# Altium PCB DMX Interface.PcbDoc (part 1 of 3)
Units mm, origin at the board's own origin, x right, y up, seen from the top; angles counter-clockwise.
Board outline 110 x 81.5 mm, 4 copper layers (Top Layer, Int1 (GND), Int2 (PWR), Bottom Layer), stack 1.586 mm thick; 144 components, 113 nets, 496 pads, 326 vias.
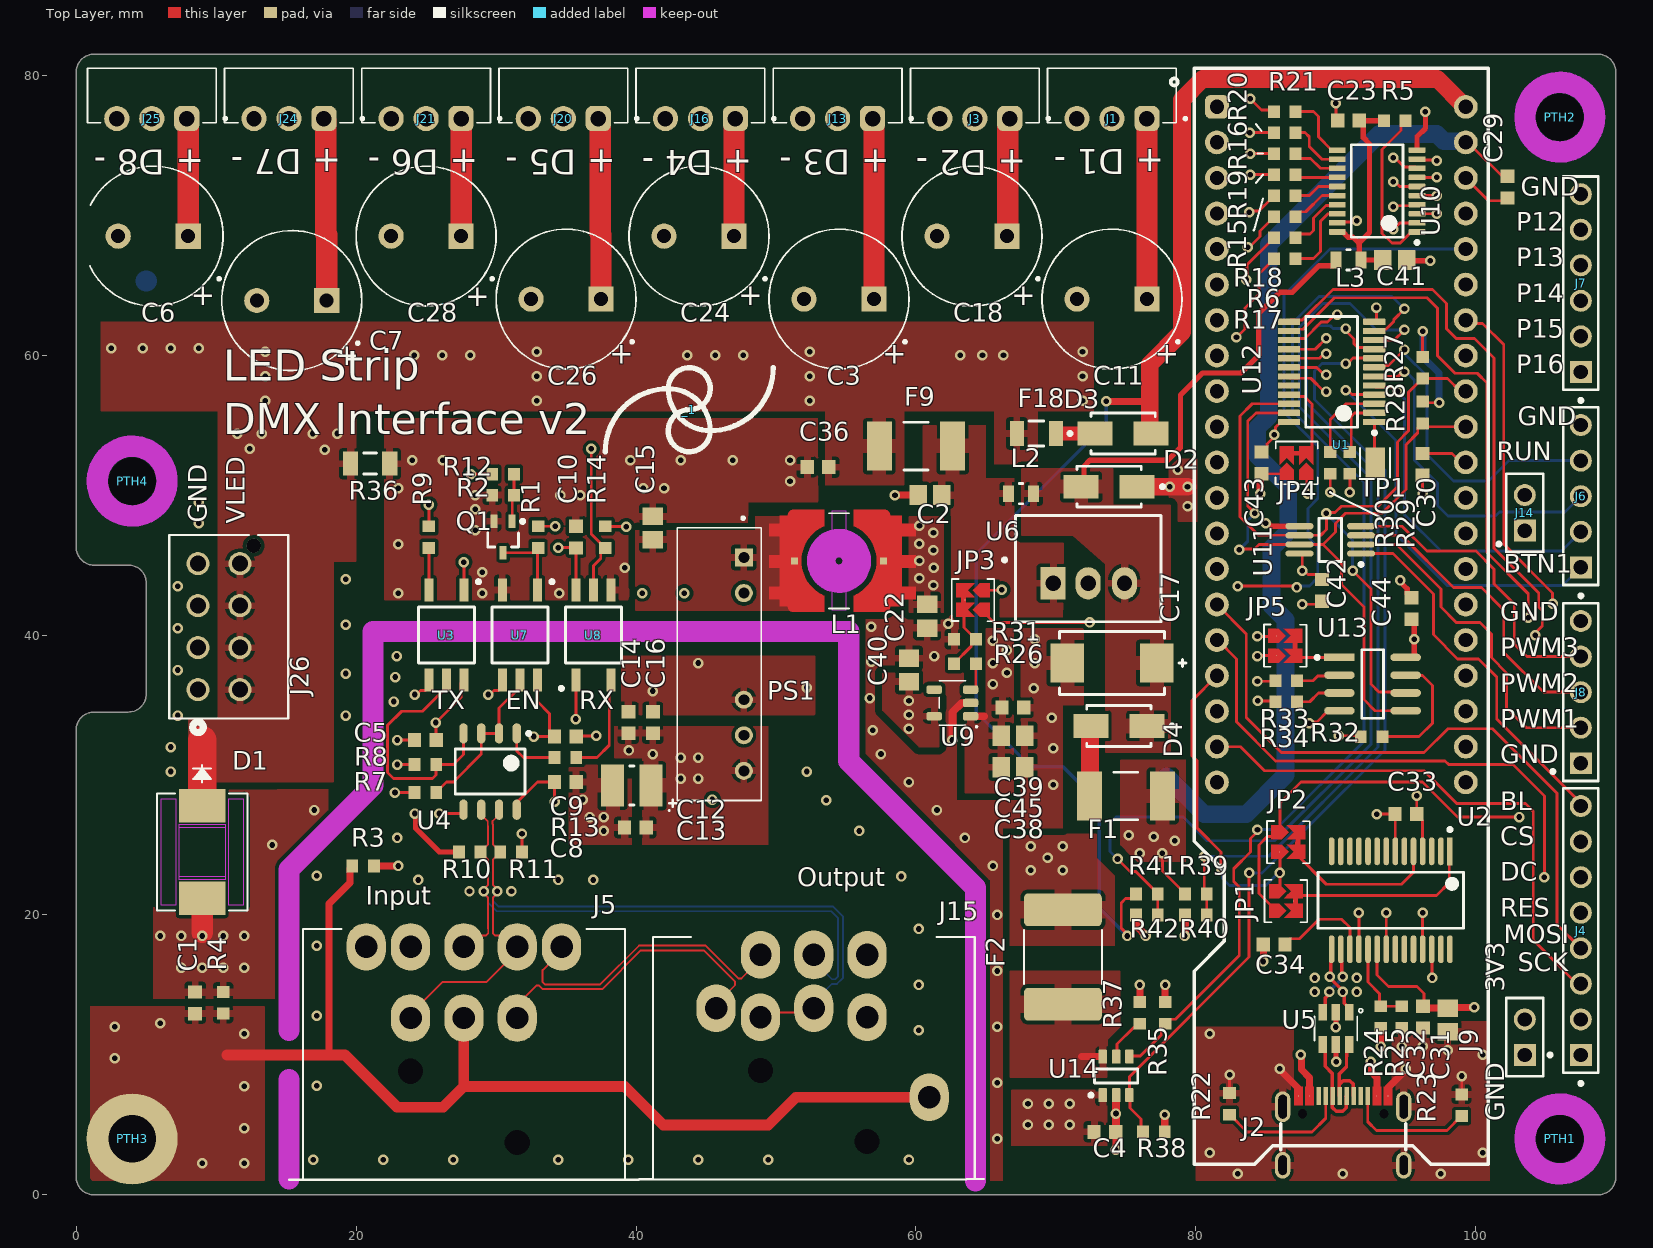
[diagram p0: Top Layer view]
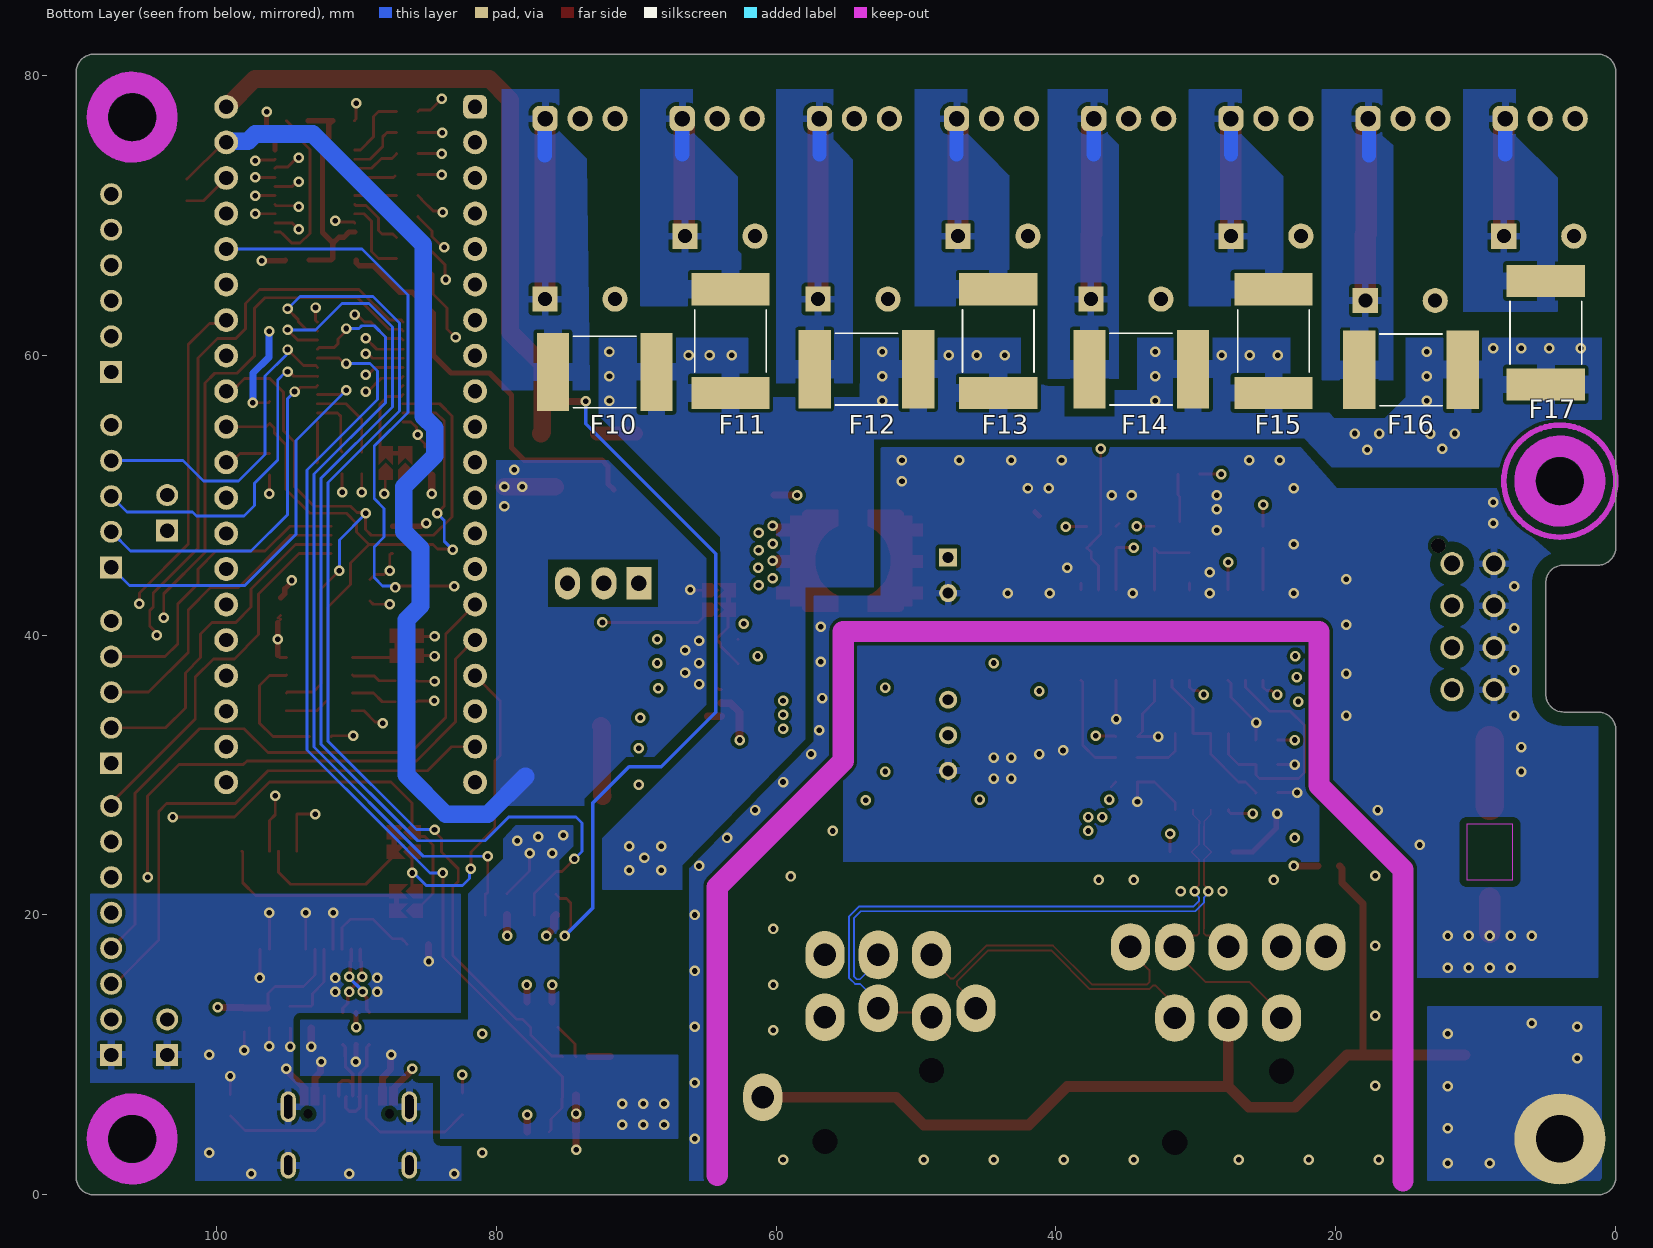
[diagram p1: Bottom Layer view, seen from below]
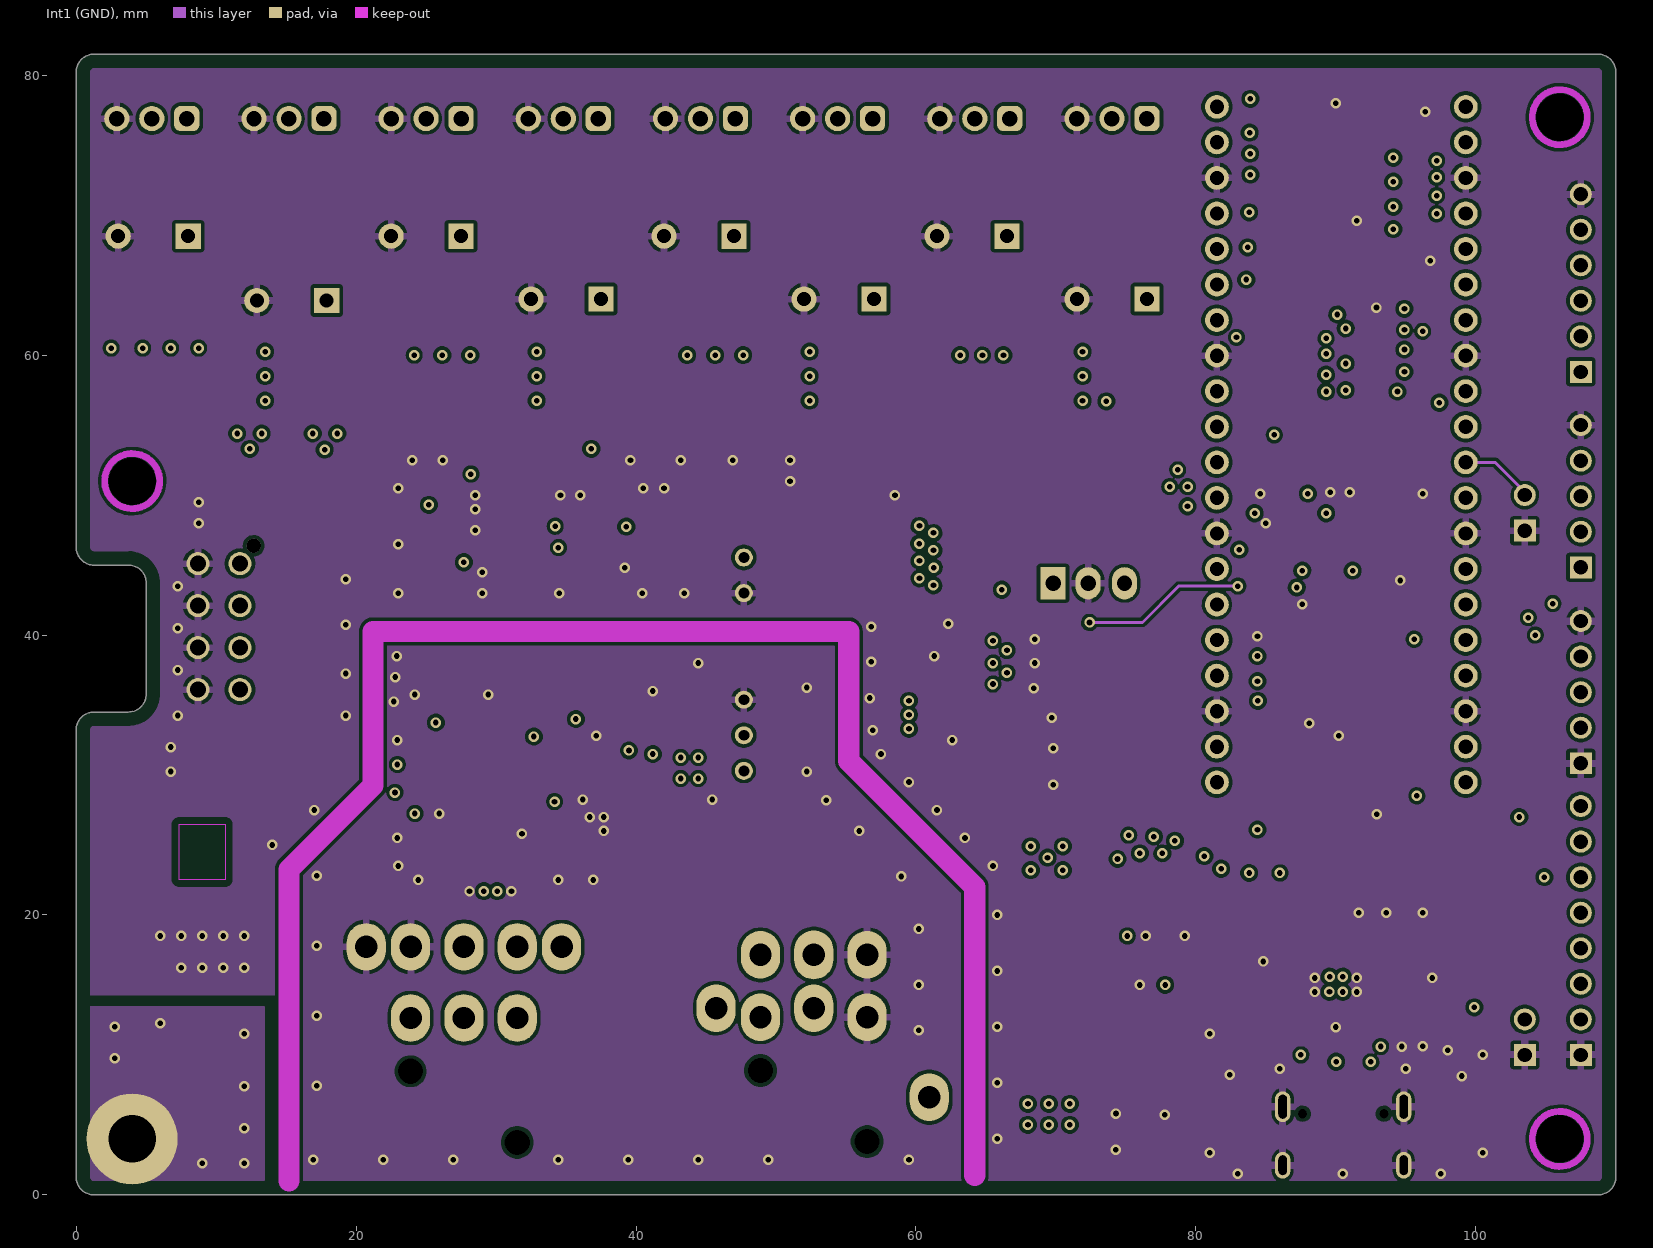
[diagram p2: Int1 (GND)]
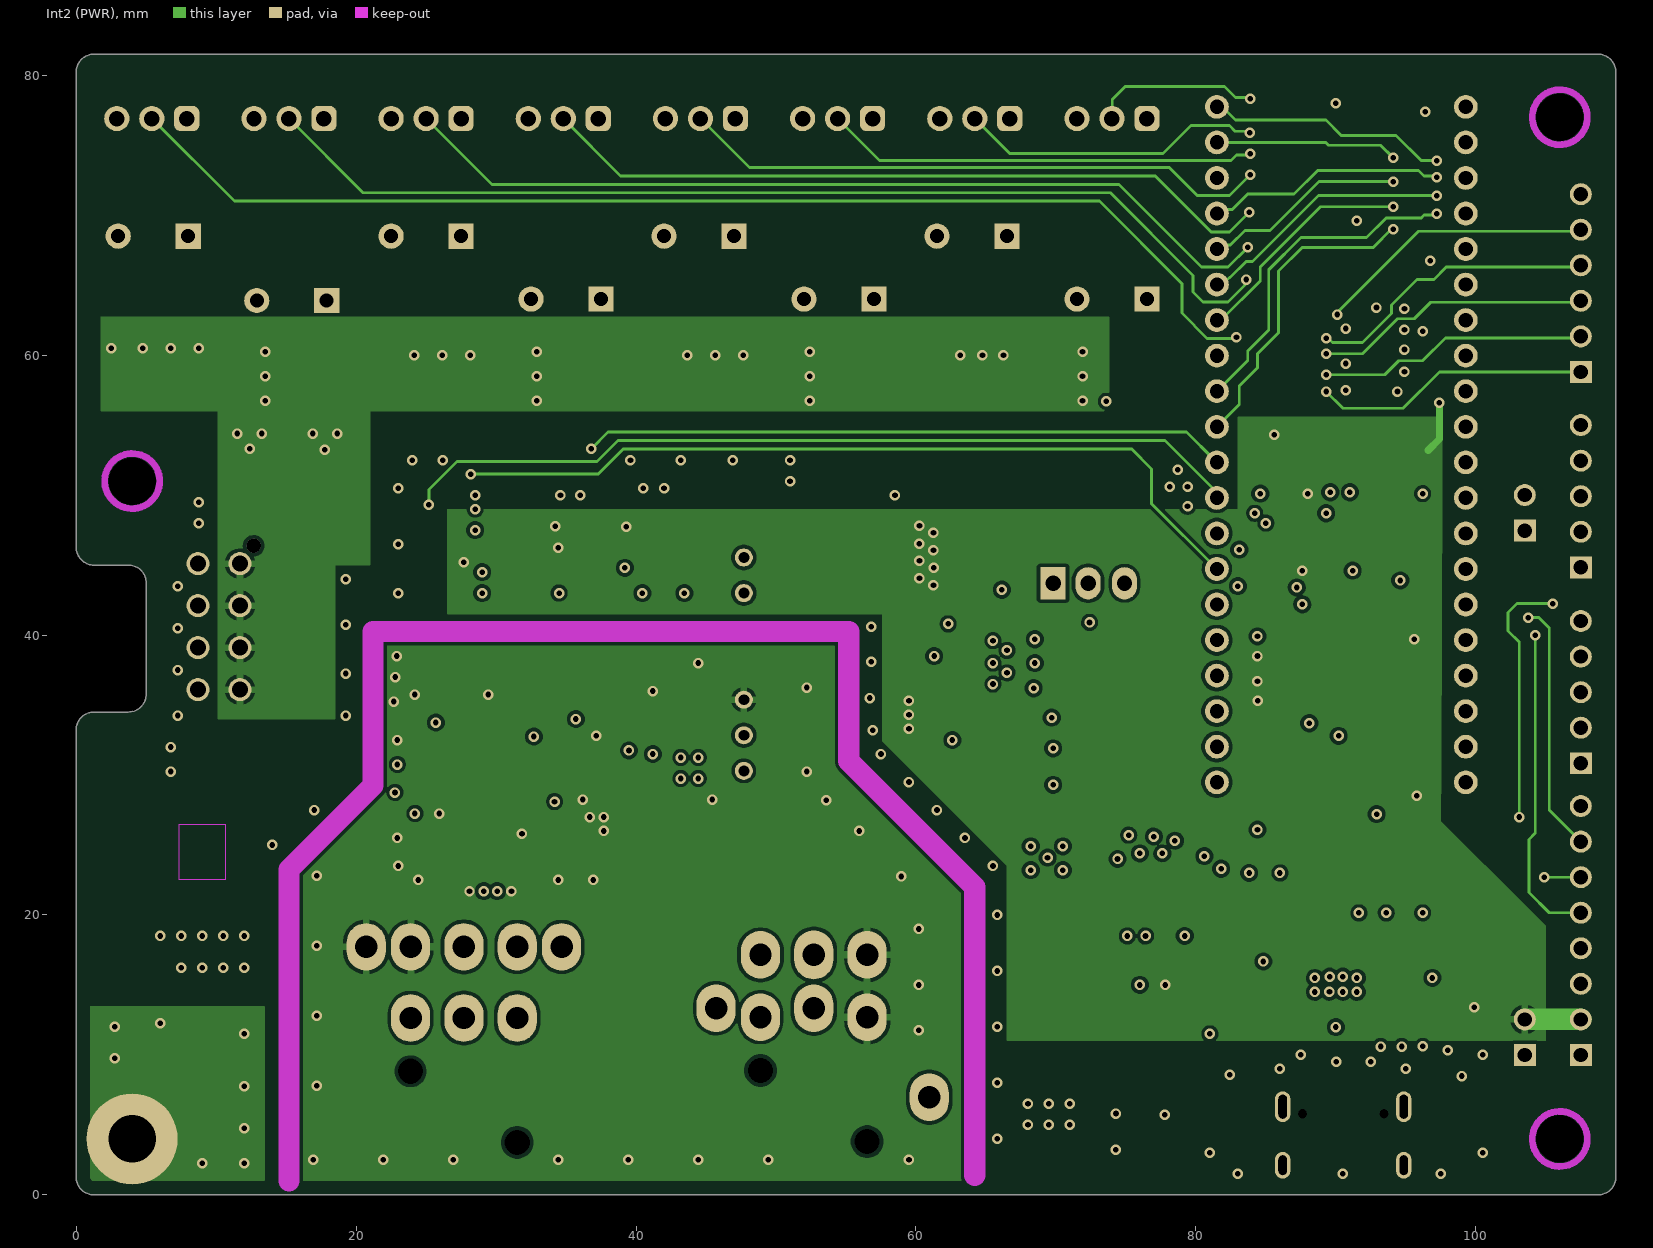
[diagram p3: Int2 (PWR)]
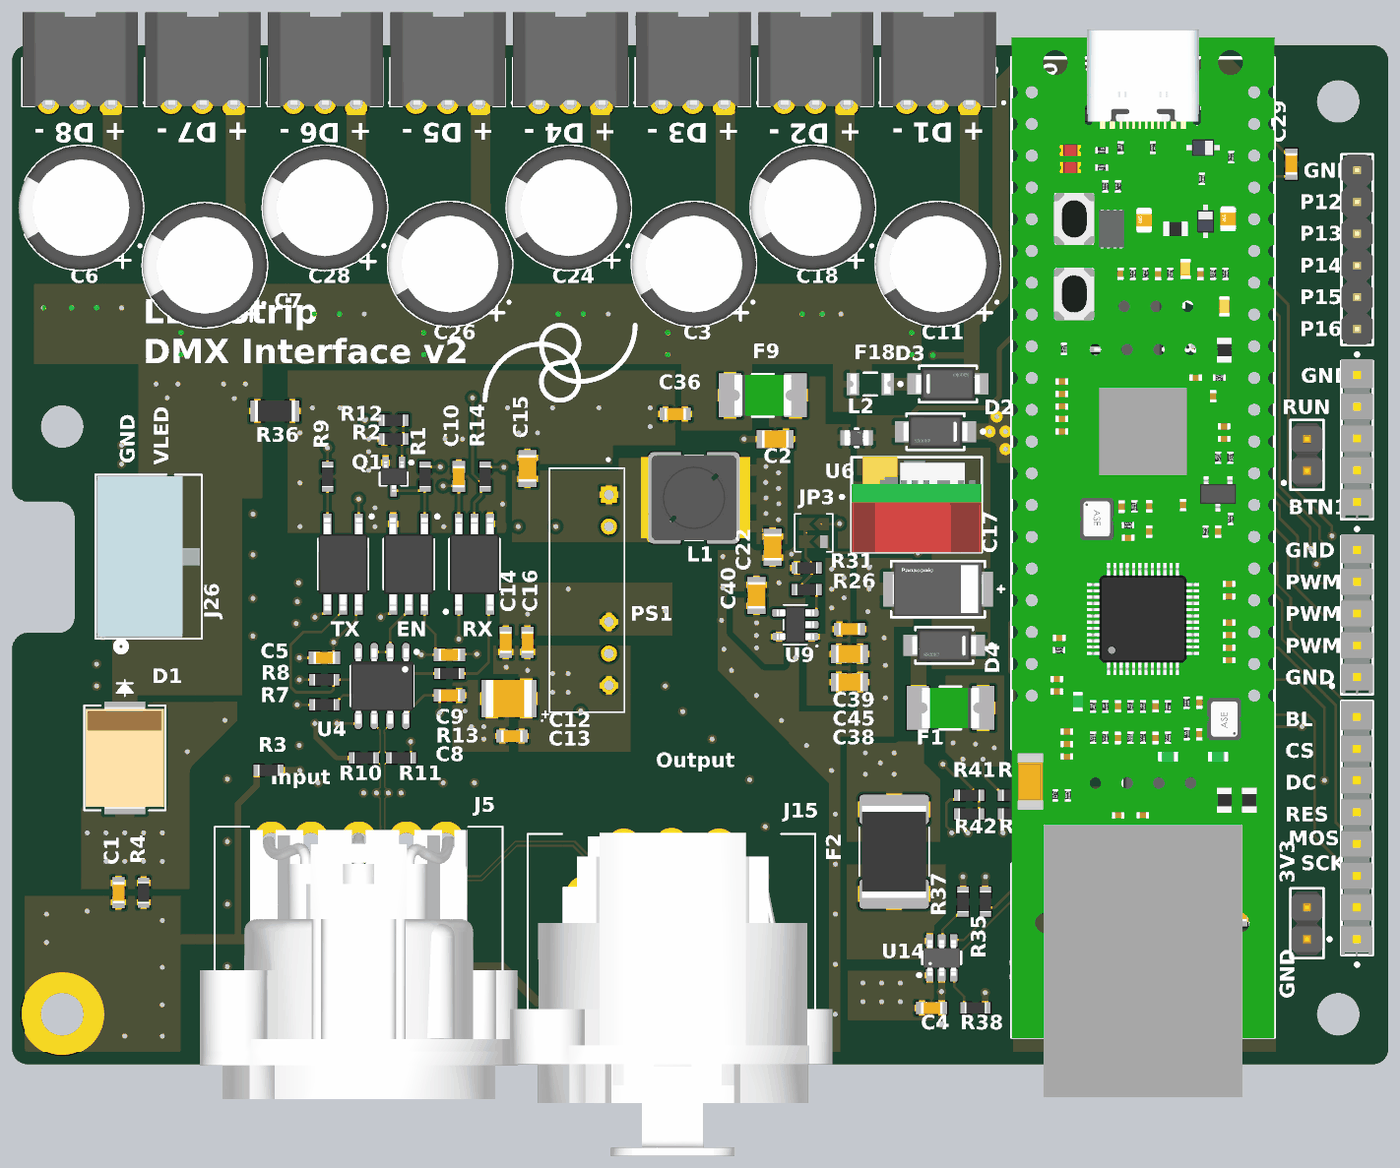
[diagram p5: 3D render of the assembled board from above, using the file's embedded part models]
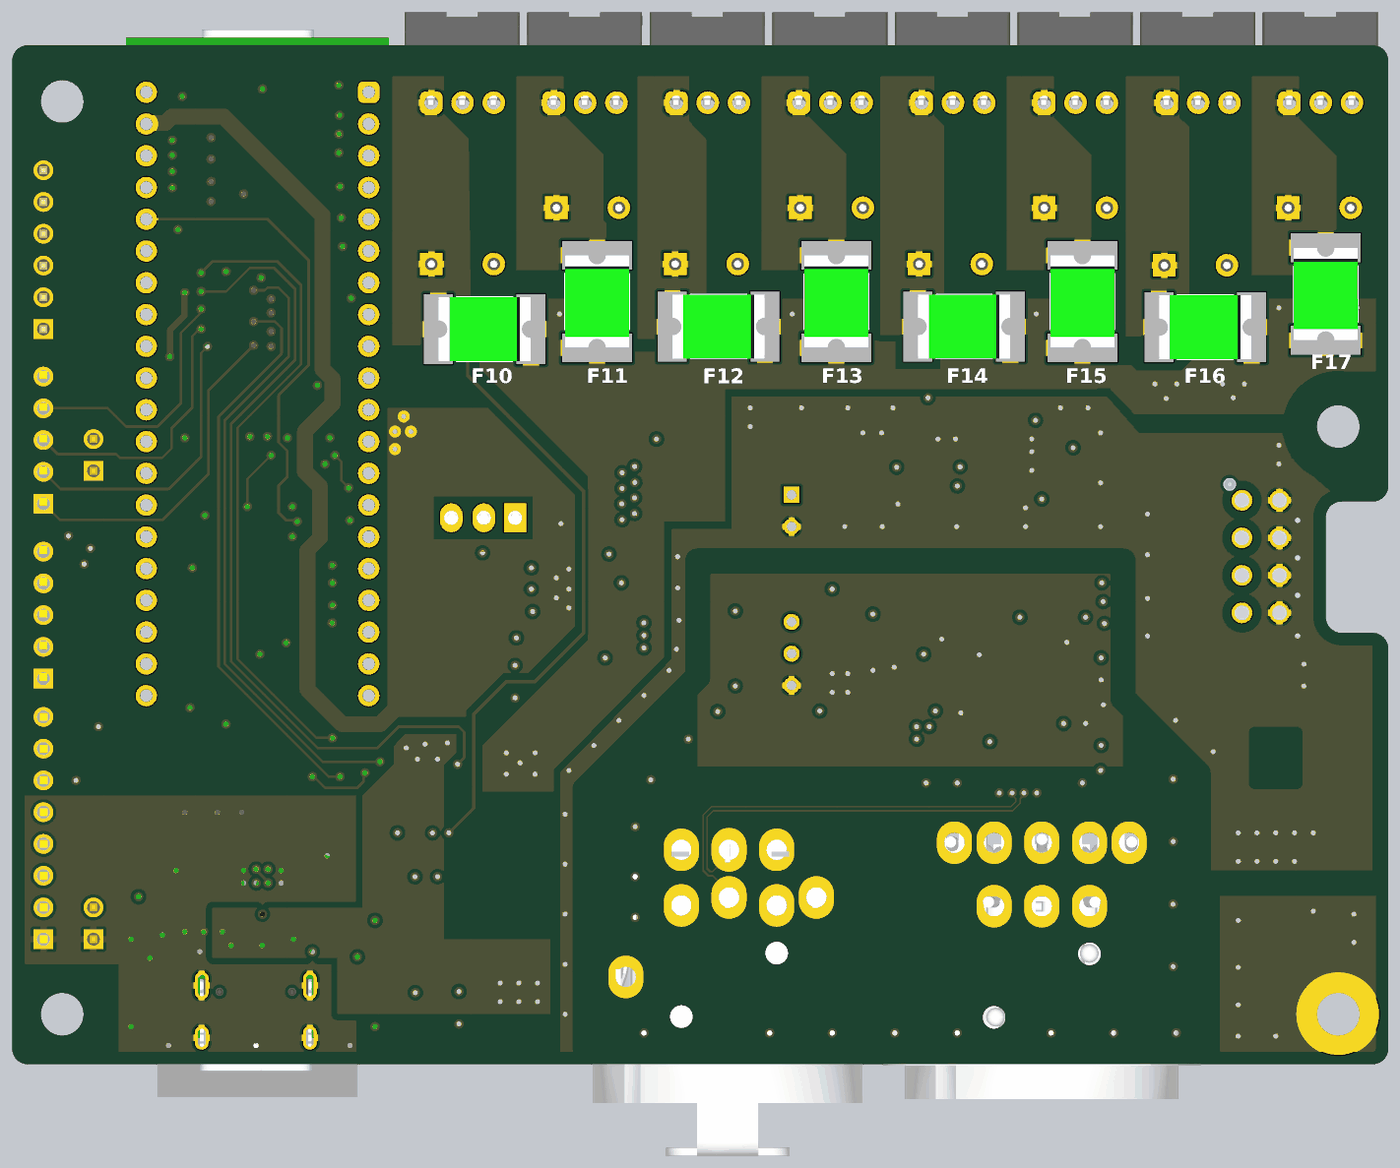
[diagram p6: 3D render of the assembled board from below, using the file's embedded part models]

## Layer stack, top to bottom
Top Solder: solder mask 0.0254, SM-001, Dk 3.8
Top Layer: signal copper 0.035
Dielectric 2: prepreg 0.2104, PP-017, Dk 4.4
Int1 (GND): signal copper 0.0152
Dielectric 3: core 1.065, Core-039, Dk 4.6
Int2 (PWR): signal copper 0.0152
Dielectric 4: prepreg 0.2104, PP-017, Dk 4.4
Bottom Layer: signal copper 0.035
Bottom Solder: solder mask 0.0254, SM-001, Dk 3.8

## Board outline
0,1.27 0,33.23 cw(c1.27,33.23) 1.27,34.5 3.73,34.5 ccw(c3.73,35.77) 5,35.77 5,43.73 ccw(c3.73,43.73) 3.73,45 1.27,45 cw(c1.27,46.27) 0,46.27 0,80.23 cw(c1.27,80.23) 1.27,81.5 108.73,81.5 cw(c108.73,80.23) 110,80.23 110,1.27 cw(c108.73,1.27) 108.73,0 1.27,0 cw(c1.27,1.27)

## Design rules (kind name [scope] priority, off if disabled: settings)
AssemblyTestPointUsage [All] p1 off:
AssemblyTestpoint [All] p1 off: testpointundercomponent=TRUE minsize=1.016 maxsize=2.54 preferedsize=1.524 minholesize=0 maxholesize=1.016 preferedholesize=0.813 testpointgrid=0.025 usegrid=TRUE gridtolerance=0 allowsidetop=TRUE allowsidebottom=TRUE
BoardOutlineClearance BoardOutlineClearance_Overlay [OnLayer('Top Overlay')] p1: gap=0.5 ignorepadtopadclearanceinfootprint=FALSE
BoardOutlineClearance [All] p2: gap=1 ignorepadtopadclearanceinfootprint=FALSE except(0.2: Arc-OutlineEdge Arc-CavityEdge Arc-CutoutEdge Arc-SplitBarrior Text-OutlineEdge Text-CavityEdge Text-CutoutEdge Text-SplitBarrior Text-SplitContinuation; 2: Arc-SplitContinuation)
Clearance Clearance_GNDtoV [InNet('GND')          AND OnBottom vs InNet('V_LED')  AND IsPad] p1: gap=0.762 ignorepadtopadclearanceinfootprint=FALSE
Clearance Clearance_Region2Region [IsRegion vs IsRegion] p2: gap=0.508 ignorepadtopadclearanceinfootprint=FALSE
Clearance Clearance_Region [IsRegion] p3: gap=0.254 ignorepadtopadclearanceinfootprint=FALSE
Clearance [All] p4: gap=0.15 ignorepadtopadclearanceinfootprint=FALSE except(0.165: Arc-Arc Arc-Track Track-Track; 0.2: Arc-THPad Arc-Via Arc-Hole Track-THPad Track-Via Track-Hole SMDPad-THPad SMDPad-Via SMDPad-Hole THPad-THPad THPad-Via THPad-Hole Via-Via Via-Hole Fill-Hole Poly-Hole Region-Hole Text-Hole)
ComponentClearance ComponentClearance_DMCcon [HasFootprint('IO-XLR5-M-BH-Footprint-1') vs HasFootprint('IO-XLR5-F-BH-Footprint-1')] p1: gap=0 collisioncheckmode=3 verticalgap=0 showdistances=FALSE
ComponentClearance [All] p2: gap=0.254 collisioncheckmode=3 verticalgap=0.254 showdistances=FALSE
DiffPairsRouting DiffPairsRouting_120 [InDifferentialPairClass('120DP')] p1: maxlimit=0.254 minlimit=0.174 mostfreqgap=0.254 toplayer_mingap=0.203 toplayer_maxgap=0.203 toplayer_prefgap=0.203 toplayer_minwidth=0.132 toplayer_maxwidth=0.132 toplayer_prefwidth=0.132 bottomlayer_mingap=0.203 bottomlayer_maxgap=0.203 bottomlayer_prefgap=0.203 bottomlayer_minwidth=0.132 bottomlayer_maxwidth=0.132 bottomlayer_prefwidth=0.132 impedanceprofiledriven=TRUE impedanceprofileid={ED160B6A-DFFA-40E4-AA87-6BFAA748216A} impedanceprofilevalue=120.000000 maxuncoupledlength=12.7
DiffPairsRouting DiffPairsRouting_120_X [InDifferentialPairClass('120DP')] p2: maxlimit=0.254 minlimit=0.174 mostfreqgap=0.254 toplayer_mingap=0.203 toplayer_maxgap=0.203 toplayer_prefgap=0.203 toplayer_minwidth=0.132 toplayer_maxwidth=0.132 toplayer_prefwidth=0.132 bottomlayer_mingap=0.203 bottomlayer_maxgap=0.203 bottomlayer_prefgap=0.203 bottomlayer_minwidth=0.132 bottomlayer_maxwidth=0.132 bottomlayer_prefwidth=0.132 impedanceprofiledriven=TRUE impedanceprofileid={ED160B6A-DFFA-40E4-AA87-6BFAA748216A} impedanceprofilevalue=120.000000 maxuncoupledlength=12.7
DiffPairsRouting DiffPairsRouting_90 [InDifferentialPairClass('90DP')] p3: maxlimit=0.254 minlimit=0.152 mostfreqgap=0.254 toplayer_maxgap=0.152 toplayer_prefgap=0.152 toplayer_minwidth=0.247 toplayer_maxwidth=0.247 toplayer_prefwidth=0.247 bottomlayer_maxgap=0.152 bottomlayer_prefgap=0.152 bottomlayer_minwidth=0.247 bottomlayer_maxwidth=0.247 bottomlayer_prefwidth=0.247 impedanceprofiledriven=TRUE impedanceprofileid={61304B62-C423-4E0F-A976-DDB821E5D5D6} impedanceprofilevalue=90.000000 maxuncoupledlength=12.7
FabricationTestPointUsage [All] p1 off: valid=0 allowmultiple=FALSE
FabricationTestpoint [All] p1 off: side=3 testpointundercomponent=TRUE minsize=1.016 maxsize=2.54 preferedsize=1.524 minholesize=0 maxholesize=1.016 preferedholesize=0.813 testpointgrid=0.025 allowsidetop=TRUE allowsidebottom=TRUE usegrid=TRUE gridtolerance=0
Height [All] p1: minheight=0 maxheight=80 prefheight=12.7
HoleSize [All] p1: absolutevalues=TRUE maxlimit=6.3 minlimit=0.2 maxpercent=80.000 minpercent=20.000
HoleToHoleClearance [All] p1: gap=0.2 allowstackedmicrovias=TRUE
MatchedLengths MatchedLengths_RMII [InxSignalClass('RMII')] p1: tolerance=0.254 checknetsindiffpair=FALSE checkdiffpairvsdiffpair=TRUE checkxsignals=TRUE checkothers=TRUE targetsourcename=RMII_TXD1_PP1
MatchedLengths MatchedLengths_QSPI [InxSignalClass('QSPI')] p2: tolerance=0.254 checknetsindiffpair=FALSE checkdiffpairvsdiffpair=TRUE checkxsignals=TRUE checkothers=TRUE
MatchedLengths MatchedLengths_Eth [InxSignalClass('Eth')] p3: tolerance=0.254 checknetsindiffpair=FALSE checkdiffpairvsdiffpair=TRUE checkxsignals=TRUE checkothers=TRUE targetsourcename=TD_N_PP1
MatchedLengths MatchedLengths_USB_STM32 [InxSignalClass('USB_STM32')] p4: tolerance=0.254 checknetsindiffpair=TRUE checkdiffpairvsdiffpair=FALSE checkxsignals=FALSE checkothers=FALSE
MatchedLengths "Matched Net Lengths rs485" [InNetClass('RS485')] p5: tolerance=0.254 checknetsindiffpair=TRUE checkdiffpairvsdiffpair=FALSE checkxsignals=FALSE checkothers=FALSE
MaxMinImpedance "Schematic Impedance Constraint" [InDifferentialPairClass('90DP')] p1: minimum=85.00 maximum=95.00
MaxMinImpedance "Schematic Impedance Constraint_1" [InNetClass('RS485')] p2: minimum=110.0 maximum=130.0
MinimumAnnularRing [All] p1: minimumring=0.152
MinimumSolderMaskSliver [All] p1: minsoldermaskwidth=0.1
PlaneConnect [All] p1: pad.planeconnectstyle=Relief pad.reliefexpansion=0.508 pad.reliefentries=4 pad.reliefconductorwidth=0.254 pad.reliefairgap=0.254 via.planeconnectstyle=Direct via.reliefexpansion=0.508 via.reliefentries=4 via.reliefconductorwidth=0.254 via.reliefairgap=0.254
PolygonConnect PolygonConnect_Biggest [HasFootprint('0ZCF0300BF2C-Footprint-1') Or HasFootprint('RESC7451X90M_2920')] p1: thpad.connectstyle=Relief thpad.reliefconductorwidth=1.27 thpad.reliefentries=4 thpad.polygonreliefangle="90 Angle" thpad.airgapwidth=0.254 smdpad.connectstyle=Relief smdpad.reliefconductorwidth=1.27 smdpad.reliefentries=4 smdpad.polygonreliefangle="90 Angle" smdpad.airgapwidth=0.254 via.connectstyle=Direct via.reliefconductorwidth=0.254 via.reliefentries=4 via.polygonreliefangle="90 Angle" via.airgapwidth=0.254
PolygonConnect PolygonConnect_1 [InNet('CHGND') vs HasFootprint('Mounting Hole M3 No Washer')] p2: connectstyle=Direct reliefconductorwidth=0.254 reliefentries=4 polygonreliefangle="90 Angle" airgapwidth=0.254
PolygonConnect PolygonConnect_Bigger [HasFootprint('FUSE4532X1.55N_1812MED') Or HasFootprint('FP-SMA-MFG') Or HasFootprint('FP-SP-Cap-X-MFG') Or HasFootprint('DO-214AC_SMA') Or HasFootprint('CAPCP3528X21N_1210_1411_MED')] p3: thpad.connectstyle=Relief thpad.reliefconductorwidth=1.016 thpad.reliefentries=4 thpad.polygonreliefangle="90 Angle" thpad.airgapwidth=0.254 smdpad.connectstyle=Relief smdpad.reliefconductorwidth=1.016 smdpad.reliefentries=4 smdpad.polygonreliefangle="90 Angle" smdpad.airgapwidth=0.254 via.connectstyle=Direct via.reliefconductorwidth=0.254 via.reliefentries=4 via.polygonreliefangle="90 Angle" via.airgapwidth=0.254
PolygonConnect [All] p4: thpad.connectstyle=Relief thpad.reliefconductorwidth=0.508 thpad.reliefentries=4 thpad.polygonreliefangle="90 Angle" thpad.airgapwidth=0.254 smdpad.connectstyle=Relief smdpad.reliefconductorwidth=0.508 smdpad.reliefentries=4 smdpad.polygonreliefangle="90 Angle" smdpad.airgapwidth=0.254 via.connectstyle=Direct via.reliefconductorwidth=0.254 via.reliefentries=4 via.polygonreliefangle="90 Angle" via.airgapwidth=0.254
RoutingVias [All] p1: holewidth=0.203 width=0.61 viastyle="Through Hole" minholewidth=0.203 minwidth=0.61 maxholewidth=3 maxwidth=8
SilkToSilkClearance [All] p1: silktosilkclearance=0.1
SilkToSolderMaskClearance [IsPad] p1: minsilkscreentomaskgap=0.15 clearancetoexposedcopper=TRUE
SolderMaskExpansion [All] p1: expansion=0.102 istentingtop=FALSE
SupplyNets "Schematic Supply Nets_7" [InNet('V_BUS_FTDI')] p1: voltage=0.000
SupplyNets "Schematic Supply Nets_5" [InNet('V_BUS_RPI')] p2: voltage=0.000
SupplyNets "Schematic Supply Nets_14" [InNet('V_LOGIC_IN')] p3: voltage=0.000
SupplyNets "Schematic Supply Nets_11" [InNet('V_SYS')] p4: voltage=0.000
SupplyNets "Schematic Supply Nets_9" [InNet('5V_LOGIC')] p5: voltage=0.000
SupplyNets "Schematic Supply Nets_4" [InNet('CHGND')] p6: voltage=0.000
SupplyNets "Schematic Supply Nets_6" [InNet('5V_LVL_SHIFT')] p7: voltage=0.000
SupplyNets "Schematic Supply Nets_17" [InNet('V_LED')] p8: voltage=0.000
SupplyNets "Schematic Supply Nets_3" [InNet('3V3ISO')] p9: voltage=0.000
SupplyNets "Schematic Supply Nets_2" [InNet('GNDISO')] p10: voltage=0.000
SupplyNets "Schematic Supply Nets_1" [InNet('3V3')] p11: voltage=0.000
SupplyNets "Schematic Supply Nets" [InNet('GND')] p12: voltage=0.000
Width Width_50SE [InNetClass('MDI')] p1: maxlimit=0.254 minlimit=0.153 preferedwidth=0.254 toplayer_maxwidth=0.153 toplayer_prefwidth=0.153 bottomlayer_maxwidth=0.153 bottomlayer_prefwidth=0.153 impedanceprofiledriven=TRUE minimp=50.000000 maximp=50.000000 favimp=50.000000
Width Width_55SE [InNetClass('55OhmSE')] p2: maxlimit=0.254 minlimit=0.123 preferedwidth=0.254 toplayer_maxwidth=0.123 toplayer_prefwidth=0.123 bottomlayer_maxwidth=0.123 bottomlayer_prefwidth=0.123 impedanceprofiledriven=TRUE minimp=50.000000 maximp=50.000000 favimp=50.000000
Width [All] p3: maxlimit=4 minlimit=0.1 preferedwidth=0.152 toplayer_prefwidth=0.152 minimp=50.000000 maximp=50.000000 favimp=50.000000
17 further rules are at their usual default settings.

## Classes and differential pairs
differential pair class 90DP: USB2.D USB2Conn.D
component class P: C2 C4 C17 C36 C38 C39 C40 C41 C45 D1 D2 D3 D4 F1 F2 F9 F18 J26 JP3 L2 L3 R26 R31 R35 R36 R37 R38 R39 R40 R41 R42 U6 U9 U14
component class Module: C29 C30 J14 U1
component class "Block Diagram": _1 PTH1 PTH2 PTH3 PTH4
differential pair class 120DP: AuxDMX DMX "DMX Interface" DMX_R
component class SmartLEDs: C3 C6 C7 C11 C18 C23 C24 C26 C28 F10 F11 F12 F13 F14 F15 F16 F17 J1 J3 J13 J16 J20 J21 J24 J25 Q R5 R6 R15 R16 R17 R18 R19 R20 R21 U10
component class UI: C42 C43 C44 J4 J6 J7 J8 J9 JP4 JP5 R27 R28 R29 R30 R32 R33 R34 TP1 U11 U12 U13
component class "USB Serial": C31 C32 C33 C34 J2 JP1 JP2 R22 R23 R24 R25 U2 U5
net class RS485: AuxDMX_n AuxDMX_p DMX_n DMX_p
component class "DMX Interface": C1 C5 C8 C9 C10 C12 C13 C14 C15 C16 C22 J5 J15 L1 PS1 Q1 R1 R2 R3 R4 R7 R8 R9 R10 R11 R12 R13 R14 U3 U4 U7 U8
differential pair USB2.D: +USB2.D_P -USB2.D_N
differential pair USB2Conn.D: +USB2Conn.D_P -USB2Conn.D_N
differential pair DMX: +DMX_p -DMX_n
differential pair AuxDMX: +AuxDMX_p -AuxDMX_n

## Components (designator, comment, footprint, x,y, rotation, side; value= is the part's Value field where it differs from the comment)
_1 "Z Logo" "Z Logo 0.5\"" 43.8,56.1 r180 top
C1 "C0603C102K5RACTU" CAPC1608X10N_0603_MED 8.5,13.725 r90 top value=1nF
C2 "GRM21BR61H106KE43L" CAPC2012X14N_0805_MED 61,50 r0 top value=10µF
C3 "REH1020471M050K" CAP_POL_DIAM10_H22_SPACING5 54.5,64 r180 top value=470µF
C4 "C1608X7R1C105K080AC" CAPC1608X10N_0603_MED 73.5,4.5 r180 top value=1µF
C5 "CC0603KRX7R0BB104" CAPC1608X10N_0603_MED 24.95,32.5 r0 top value=100nF
C6 "REH1020471M050K" CAP_POL_DIAM10_H22_SPACING5 5.5,68.5 r180 top value=470µF
C7 "REH1020471M050K" CAP_POL_DIAM10_H22_SPACING5 15.4,63.9 r180 top value=470µF
C8 "CC0603KRX7R0BB104" CAPC1608X10N_0603_MED 34.95,29.5 r0 top value=100nF
C9 "CC0603KRX7R0BB104" CAPC1608X10N_0603_MED 34.95,32.75 r180 top value=100nF
C10 "CC0603KRX7R0BB104" CAPC1608X10N_0603_MED 35.7,47 r90 top value=100nF
C11 "REH1020471M050K" CAP_POL_DIAM10_H22_SPACING5 74,64 r180 top value=470µF
C12 "TPSB226K010R0500" CAPCP3528X21N_1210_1411_MED 39.7,29.25 r180 top value=22µF
C13 "CC0603KRX7R0BB104" CAPC1608X10N_0603_MED 39.95,26.25 r0 top value=100nF
C14 "CC0603KRX7R0BB104" CAPC1608X10N_0603_MED 39.45,33.75 r270 top value=100nF
C15 "CGA4J3X7R1H225K125AE" CAPC2012X14N_0805_MED 41.2,47.65 r270 top value=2.2µF
C16 "CC0603KRX7R0BB104" CAPC1608X10N_0603_MED 41.2,33.75 r270 top value=100nF
C17 "EEF-CX1C470R" FP-SP-Cap-X-MFG 74,38 r0 top value=47µF
C18 "REH1020471M050K" CAP_POL_DIAM10_H22_SPACING5 64,68.5 r180 top value=470µF
C22 "CGA4J3X7R1H225K125AE" CAPC2012X14N_0805_MED 60.8,41.35 r90 top value=2.2µF
C23 "CC0603KRX7R0BB104" CAPC1608X10N_0603_MED 90.9,76.75 r0 top value=100nF
C24 "REH1020471M050K" CAP_POL_DIAM10_H22_SPACING5 44.5,68.5 r180 top value=470µF
C26 "REH1020471M050K" CAP_POL_DIAM10_H22_SPACING5 35,64 r180 top value=470µF
C28 "REH1020471M050K" CAP_POL_DIAM10_H22_SPACING5 25,68.5 r180 top value=470µF
C29 "CC0603KRX7R0BB104" CAPC1608X10N_0603_MED 102.25,72 r270 top value=100nF
C30 "CC0603KRX7R0BB104" CAPC1608X10N_0603_MED 96.2,52.2 r270 top value=100nF
C31 "GRM21BC81C106KA73L" CAPC2012X14N_0805_MED 98,12.5 r90 top value=10µF
C32 "CC0603KRX7R0BB104" CAPC1608X10N_0603_MED 96.218,12.701 r270 top value=100nF
C33 "CC0603KRX7R0BB104" CAPC1608X10N_0603_MED 95,27.2 r180 top value=100nF
C34 "CC0603KRX7R0BB104" CAPC1608X10N_0603_MED 85.593,17.901 r180 top value=100nF
C36 "CC0603KRX7R0BB104" CAPC1608X10N_0603_MED 53,52 r180 top value=100nF
C38 "GRM21BC81C226ME44L" CAPC2012X14N_0805_MED 66.925,30.562 r180 top value=22µF
C39 "C1608X7R1C105K080AC" CAPC1608X10N_0603_MED 66.925,34.812 r180 top value=1µF
C40 "GRM21BC81C106KA73L" CAPC2012X14N_0805_MED 59.5,37.5 r270 top value=10µF
C41 "GRM21BC81C106KA73L" CAPC2012X14N_0805_MED 94.2,66.8 r180 top value=10µF
C42 "CC0603KRX7R0BB104" CAPC1608X10N_0603_MED 89,43.2 r90 top value=100nF
C43 "CC0603KRX7R0BB104" CAPC1608X10N_0603_MED 84.7,52.3 r90 top value=100nF
C44 "CC0603KRX7R0BB104" CAPC1608X10N_0603_MED 95.4,41.9 r90 top value=100nF
C45 "GRM21BC81C226ME44L" CAPC2012X14N_0805_MED 66.925,32.812 r180 top value=22µF
D1 "SMDJ5.0A" SMDJ_DO-214AB 9,24.5 r270 top
D2 "B340A-13-F" DO-214AC_SMA 73.8,50.6 r180 top
D3 "B360A-13-F" FP-SMA-MFG 74.8,54.4 r0 top
D4 "B360A-13-F" FP-SMA-MFG 74.5,33.5 r180 top
F1 "1812L110/33MR" FUSE4532X1.55N_1812MED 75,28.5 r180 top
F2 "0ZCF0200FF2C" RESC7451X90M_2920 70.5,17 r270 top
F9 "1812L110/33MR" FUSE4532X1.55N_1812MED 60,53.5 r0 top
F10 "0ZCF0300BF2C" 0ZCF0300BF2C-Footprint-1 72.237,58.794 r0 bottom
F11 "0ZCF0300BF2C" 0ZCF0300BF2C-Footprint-1 63.25,61 r270 bottom
F12 "0ZCF0300BF2C" 0ZCF0300BF2C-Footprint-1 53.534,59 r0 bottom
F13 "0ZCF0300BF2C" 0ZCF0300BF2C-Footprint-1 44.12,61 r270 bottom
F14 "0ZCF0300BF2C" 0ZCF0300BF2C-Footprint-1 33.913,59 r0 bottom
F15 "0ZCF0300BF2C" 0ZCF0300BF2C-Footprint-1 24.455,61 r270 bottom
F16 "0ZCF0300BF2C" 0ZCF0300BF2C-Footprint-1 14.634,58.95 r0 bottom
F17 "0ZCF0300BF2C" 0ZCF0300BF2C-Footprint-1 5,61.6 r270 bottom
F18 "1206L050/15YR" FP-1206L-MFG 68.6,54.4 r180 top
J1 "1778638" 1778638-Footprint-1 76.5,76.9 r180 top
J2 "TYPE-C-31-M-12" Type-C-31-M-12 86.2,6.3 r0 top
J3 "1778638" 1778638-Footprint-1 66.7,76.9 r180 top
J4 "Header 8x1 0.1\"" "HEADER 8x1 0.1\"" 107.5,10 r90 top
J5 "IO-XLR5-M-BH" IO-XLR5-M-BH-Footprint-1 27.7,-0.06 r180 top locked
J6 "Header 5x1 0.1\"" "HEADER 5x1 0.1\"" 107.5,44.84 r90 top
J7 "Header 6x1 0.1\"" "Copy of HEADER 7x1 0.1\"" 107.5,58.8 r90 top
J8 "Header 5x1 0.1\"" "HEADER 5x1 0.1\"" 107.5,30.84 r90 top
J9 "Header 2x1 0.1\"" FP-M20-9990245-MFG 103.5,11.27 r90 top
J13 "1778638" 1778638-Footprint-1 56.9,76.9 r180 top
J14 "Header 2x1 0.1\"" FP-M20-9990245-MFG 103.5,48.73 r90 top
J15 "IO-XLR5-F-BH" IO-XLR5-F-BH-Footprint-1 52.7,0 r180 top locked
J16 "1778638" 1778638-Footprint-1 47.1,76.9 r180 top
J20 "1778638" 1778638-Footprint-1 37.3,76.9 r180 top
J21 "1778638" 1778638-Footprint-1 27.5,76.9 r180 top
J24 "1778638" 1778638-Footprint-1 17.7,76.9 r180 top
J25 "1778638" 1778638-Footprint-1 7.9,76.9 r180 top
J26 "206832-0801" 206832-0801-Footprint-1 8.7,36.1 r270 top
JP1 "Jumper 3 x 1 Bridge 1-2 Solder Bridge" "Jumper 3 Solder Bridge 1-2 0603" 86.425,21.7 r0 top value=0
JP2 "Jumper 3 x 1 Bridge 1-2 Solder Bridge" "Jumper 3 Solder Bridge 1-2 0603" 86.6,25.9 r0 top value=0
JP3 "Jumper 3 x 1 Bridge 1-2 Solder Bridge" "Jumper 3 Solder Bridge 1-2 0603" 64.075,41.8 r180 top value=0
JP4 "Jumper 3 x 1 Bridge 1-2 Solder Bridge" "Jumper 3 Solder Bridge 1-2 0603" 86.5,52.3 r90 top value=0
JP5 "Jumper 3 x 1 Bridge 1-2 Solder Bridge" "Jumper 3 Solder Bridge 1-2 0603" 86.383,39.935 r0 top value=0
L1 "SRR6038-180Y" IND_SRR6038-180Y 54.5,45.3 r180 top
L2 "MPZ2012S601AT000" FP-MPZ2012-MFG 67.5,50.1 r0 top
L3 "MPZ2012S601AT000" FP-MPZ2012-MFG 90.9,66.8 r0 top
PS1 "1S7BE_0303S3U" CONV_1S7BE_0303S3U 45.95,37.92 r270 top
PTH1 "Mounting Hole NPTH" "Mounting Hole M3 No Washer NPTH" 106,4 r90 top
PTH2 "Mounting Hole NPTH" "Mounting Hole M3 No Washer NPTH" 106,77 r90 top
PTH3 "Mounting Hole" "Mounting Hole M3 No Washer" 4,4 r270 top
PTH4 "Mounting Hole NPTH" "Mounting Hole M3 No Washer NPTH" 4,51 r270 top
Q1 "2N7002KW" ONSEMI_SOT65P210X110-3N 30.5,47 r270 top
R1 "RC0603FR-07220RL" RESC1608X06N_0603_MED 33,47 r90 top value=220
R2 "RC0603DR-07100KL" RESC1608X06N_0603_MED 30.5,50 r0 top value=100k
R3 "RC0603FR-071ML" RESC1608X06N_0603_MED 20.5,23.5 r180 top value=1M
R4 "RC0603FR-070RL" RESC1608X06N_0603_MED 10.5,13.725 r90 top value=0
R5 "RC0603FR-070RL" RESC1608X06N_0603_MED 94.2,76.75 r180 top value=0
R6 "RC0603FR-07330RL" RESC1608X06N_0603_MED 86.35,68.4 r180 top value=330
R7 "RC0603FR-07470RL" RESC1608X06N_0603_MED 24.95,28.75 r180 top value=470
R8 "RC0603FR-07470RL" RESC1608X06N_0603_MED 24.95,30.75 r180 top value=470
R9 "RC0603FR-07220RL" RESC1608X06N_0603_MED 25.2,47 r270 top value=220
R10 "RC0603FR-07680RL" RESC1608X06N_0603_MED 28.125,24.5 r180 top value=680
R11 "RC0603FR-07680RL" RESC1608X06N_0603_MED 31.075,24.5 r180 top value=680
R12 "RC0603FR-07330RL" RESC1608X06N_0603_MED 30.5,51.5 r0 top value=330
R13 "RC0603FR-07220RL" RESC1608X06N_0603_MED 34.95,31.25 r180 top value=220
R14 "RC0603FR-072K2L" RESC1608X06N_0603_MED 37.8,47 r90 top value=2.2k
R15 "RC0603FR-07330RL" RESC1608X06N_0603_MED 86.35,71.4 r180 top value=330
R16 "RC0603FR-07330RL" RESC1608X06N_0603_MED 86.35,74.4 r180 top value=330
R17 "RC0603FR-07330RL" RESC1608X06N_0603_MED 86.35,66.9 r180 top value=330
R18 "RC0603FR-07330RL" RESC1608X06N_0603_MED 86.35,69.9 r180 top value=330
R19 "RC0603FR-07330RL" RESC1608X06N_0603_MED 86.35,72.9 r180 top value=330
R20 "RC0603FR-07330RL" RESC1608X06N_0603_MED 86.35,75.9 r180 top value=330
R21 "RC0603FR-07330RL" RESC1608X06N_0603_MED 86.35,77.4 r180 top value=330
R22 "RC0603FR-075K1L" RESC1608X06N_0603_MED 82.4,6.5 r90 top value=5.1k
R23 "RC0603FR-075K1L" RESC1608X06N_0603_MED 98.984,6.401 r90 top value=5.1k
R24 "RC0603FR-074K7L" RESC1608X06N_0603_MED 93.218,12.701 r270 top value=4.7k
R25 "RC0603FR-1010KL" RESC1608X06N_0603_MED 94.718,12.701 r90 top value=10k
R26 "RC0603FR-1010KL" RESC1608X06N_0603_MED 63.5,37.95 r0 top value=10k
R27 "RC0603FR-072K2L" RESC1608X06N_0603_MED 96.2,59.1 r90 top value=2.2k
R28 "RC0603FR-072K2L" RESC1608X06N_0603_MED 96.2,55.9 r90 top value=2.2k
R29 "RC0603FR-070RL" RESC1608X06N_0603_MED 91,52.3 r270 top value=0
R30 "RC0603FR-070RL" RESC1608X06N_0603_MED 89.6,52.3 r270 top value=0
R31 "RC0603DR-07100KL" RESC1608X06N_0603_MED 63.5,39.7 r0 top value=100k
R32 "RC0603FR-070RL" RESC1608X06N_0603_MED 92.555,32.741 r180 top value=0
R33 "RC0603FR-070RL" RESC1608X06N_0603_MED 86.458,36.735 r0 top value=0
R34 "RC0603FR-070RL" RESC1608X06N_0603_MED 86.458,35.235 r0 top value=0
R35 "RC0603DR-07100KL" RESC1608X06N_0603_MED 77.8,13 r90 top value=100k
R36 "RC1206FR-0710KL" RESC3116X06N_1206MED 21,52.25 r0 top value=10k
R37 "RC0603FR-0718KL" RESC1608X06N_0603_MED 76,13 r270 top value=18k
R38 "RC0603DR-07100KL" RESC1608X06N_0603_MED 77,4.5 r0 top value=100k
R39 "RC0603FR-1010KL" RESC1608X06N_0603_MED 80,21.5 r180 top value=10k
R40 "RC0603FR-0720KL" RESC1608X06N_0603_MED 80,20 r0 top value=20k
R41 "RC0603FR-1010KL" RESC1608X06N_0603_MED 76.5,21.5 r180 top value=10k
R42 "RC0603FR-0720KL" RESC1608X06N_0603_MED 76.5,20 r0 top value=20k
TP1 "S2751-46R" S2751-46R 92.8,52.3 r270 top
U1 "W6300-EVB-PICO2" W6300-EVB-PICO2_0.4375_standoff 81.5,77.74 r0 top locked
U2 "FT232RNL" FP-FT232RNL-REEL-MFG 93.923,21.051 r270 top locked
U3 "TLP2368(TPL,E" SOT125P700X220-5N 26.45,40 r270 top
U4 "THVD1400DR" SOIC127P600X175-8N 29.575,30.25 r270 top
U5 "USBLC6-2SC6" ESD_SOT23-6L 90,11.894 r180 top
U6 "OKI-78SR-5/1.5-W36-C" MURA-OKI-78SR-3 72.3,43.7 r180 top
U7 "TLP2368(TPL,E" SOT125P700X220-5N 31.7,40 r270 top
U8 "TLP2368(TPL,E" SOT125P700X220-5N 36.95,40 r90 top
U9 "TLV75733PDYDR" SOT95P280X145-5N 62.6,35.15 r180 top
U10 "SN74ACT245PWR" PW0020A_L 92.95,71.725 r180 top
U11 "PCA9633DP1,118" NXP-TSSOP-8_M 89.6,46.8 r180 top
U12 "TCA9555PWR" PW0024A_M 89.7,58.8 r180 top locked
U13 "M24C02-RMN6TP" M24C02-RMN6TP-SO8N-IPC_B 92.621,36.5 r0 top
U14 "TPS2553DBVR-1" DBV0006A_N 74.3,8.5 r90 top

## Footprints (in the part's own frame and the unit in brackets; to place one, negate y for a bottom-side part, rotate by r counter-clockwise, add the part's x,y. Pads: shape width x height; smd on the part's side, far side on the other; paste and mask are expansions set on the pad)
0ZCF0300BF2C-Footprint-1 [mm]
  rect 2.3x5.6 smd paste+0 mask+0.102: 1(-3.7,0) 2(3.7,0)
  silkscreen extent -2.23,-2.56 2.23,2.56, body extent -3.68,-2.56 3.68,2.56, height 1.75
206832-0801-Footprint-1 [mm] "Micro-Fit+ vertical header 8 pin"
  round 1.65 hole 1.15: 1(0,0) 2(-3,0) 3(-6,0) 4(-9,0) 5(0,3) 6(-3,3) 7(-6,3) 8(-9,3)
  round 1.016 hole 1.016 unplated mask+0: 9(-10.28,3.98)
  silkscreen extent -11.05,-2.06 3.07,6.45, body extent -10.93,-1.94 1.92,6.32, height 9.93
1778638-Footprint-1 [mm]
  rrect50% 1.8x1.8 hole 1.1: 1(0,0)
  round 1.8 hole 1.1: 2(2.5,0) 3(5,0)
  silkscreen extent -2.85,-3.6 7.1,0.3, body extent -2.15,-7.23 7.07,0.27, height 5.03
CAP_POL_DIAM10_H22_SPACING5 [mm] "Diameter 8mm / Height 22mm / Lead Spacing 5mm"
  rect 1.8x1.8 hole 1: 1(-2.5,0)
  round 1.8 hole 1: 2(2.5,0)
  silkscreen extent -5,-5 5,5, body extent -5,-5 5,5, height 20
CAPC1608X10N_0603_MED [mm] "Chip Capacitor, 2-Leads, Body 1.60x0.81mm, IPC Medium Density"
  rect 0.95x1 smd: 1(-0.775,0) 2(0.775,0)
  body extent -0.87,-0.48 0.87,0.48, height 0.96
CAPC2012X14N_0805_MED [mm] "Chip Capacitor, 2-Leads, Body 2.00x1.25mm, IPC Medium Density"
  rect 1.25x1.45 smd: 1(-0.85,0) 2(0.85,0)
  body extent -1.07,-0.7 1.07,0.7, height 1.4
CAPCP3528X21N_1210_1411_MED [mm] "Chip Capacitor, 2-Leads, Body 3.50x2.80mm, IPC Medium Density"
  rect 1.65x3 smd: 1(-1.375,0) 2(1.375,0)
  silkscreen extent -3.17,-1.4 0.15,1.83, body extent -1.85,-1.5 1.85,1.5, height 2.1
CONV_1S7BE_0303S3U [mm]
  rect 1.288x1.288 / inner round 1.288 / far side rect 1.288x1.288 hole 0.78: 1(-7.62,1.75)
  round 1.288 hole 0.78: 2(-5.08,1.75) 5(2.54,1.75) 6(5.08,1.75) 7(7.62,1.75)
  silkscreen extent -10.53,-3 9.75,3, body extent -9.76,-3 9.75,3.01, height 9.5
"Copy of HEADER 7x1 0.1\"" [mm]
  rect 1.57x1.57 hole 1.02 paste-2539.97 mask+0: 1(0,0)
  round 1.57 hole 1.02 paste-2539.97 mask+0: 2(2.54,0) 3(5.08,0) 4(7.62,0) 5(10.16,0) 6(12.7,0)
  silkscreen extent -2.16,-1.25 13.97,1.25, body extent -1.27,-1.25 13.97,1.25, height 8.5
DBV0006A_N [mm] "SOT23, 6-Leads, Body 3.05x1.75mm, Pitch 0.95mm, IPC Medium Density"
  rrect17% 1x0.6 smd: 1(-1.375,0.95) 2(-1.375,0) 3(-1.375,-0.95) 4(1.375,-0.95) 5(1.375,0) 6(1.375,0.95)
  silkscreen extent -1.5,-1.55 0.5,1.92, body extent -1.42,-1.46 1.42,1.46, height 1.11
DO-214AC_SMA [mm]
  rect 2.5x1.7 smd paste+0 mask+0: 1(-2,0) 2(2,0)
  silkscreen extent -3.93,-1.46 2.3,1.46, body extent -3.35,-1.56 3.35,1.56, height 0.25
ESD_SOT23-6L [mm]
  rect 0.6x1.2 smd mask+0.05: 1(-0.95,-1.15) 2(0,-1.15) 3(0.95,-1.15) 4(0.95,1.15) 5(0,1.15) 6(-0.95,1.15)
  silkscreen extent -1.92,-1.41 1.53,0.87, body extent -1.52,-1.5 1.52,1.5, height 1.45
FP-1206L-MFG [mm]
  rect 1x1.8 smd paste+0 mask+0: 1(-1.4,0) 2(1.4,0)
  silkscreen extent -0.53,-0.9 0.53,0.9, body extent -2,-1 2,1, height 0.25
FP-FT232RNL-REEL-MFG [mm]
  rect 2x0.4 smd paste+0 mask+0: 1(-3.5,4.225)
  rrect100% 2x0.4 smd paste+0 mask+0: 2(-3.5,3.575) 3(-3.5,2.925) 4(-3.5,2.275) 5(-3.5,1.625) 6(-3.5,0.975) 7(-3.5,0.325) 8(-3.5,-0.325) 9(-3.5,-0.975) 10(-3.5,-1.625) 11(-3.5,-2.275) 12(-3.5,-2.925) 13(-3.5,-3.575) 14(-3.5,-4.225) 15(3.5,-4.225) 16(3.5,-3.575) 17(3.5,-2.925) 18(3.5,-2.275) 19(3.5,-1.625) 20(3.5,-0.975) 21(3.5,-0.325) 22(3.5,0.325) 23(3.5,0.975) 24(3.5,1.625) 25(3.5,2.275) 26(3.5,2.925) 27(3.5,3.575) 28(3.5,4.225)
  silkscreen extent -5.17,-5.2 2,5.2, body extent -4.6,-5.3 4.6,5.3, height 0.25
FP-M20-9990245-MFG [mm]
  rect 1.57x1.57 hole 1.02 paste-2539.97 mask+0: 1(-1.27,0)
  round 1.57 hole 1.02 paste-2539.97 mask+0: 2(1.27,0)
  silkscreen extent -2.79,-1.92 2.79,1.32, body extent -2.89,-1.42 2.89,1.42, height 0.25
FP-MPZ2012-MFG [mm]
  rect 0.8x1.2 smd paste+0 mask+0: 1(-0.9,0) 2(0.9,0)
  silkscreen extent -0.13,-0.72 0.13,0.72, body extent -1.4,-0.82 1.4,0.82, height 0.25
FP-SMA-MFG [mm]
  rect 2.5x1.7 smd paste+0 mask+0: 1(-2,0) 2(2,0)
  silkscreen extent -3.92,-1.46 2.3,1.46, body extent -3.35,-1.56 3.35,1.56, height 0.25
FP-SP-Cap-X-MFG [mm]
  rect 2.4x2.8 smd paste+0 mask+0: 1(3.2,0) 2(-3.2,0)
  silkscreen extent -3.75,-2.25 5.3,2.25, body extent -4.5,-2.35 4.5,2.35, height 0.25
FUSE4532X1.55N_1812MED [mm] "Chip Fuse, 2-Leads, IPC Medium Density"
  rect 1.78x3.5 smd: 1(-2.615,0) 2(2.615,0)
  silkscreen extent -0.85,-1.7 0.85,1.7, body extent -2.27,-1.62 2.27,1.62, height 0.7
"HEADER 5x1 0.1\"" [mm]
  rect 1.57x1.57 hole 1.02 paste-2539.97 mask+0: 1(0,0)
  round 1.57 hole 1.02 paste-2539.97 mask+0: 2(2.54,0) 3(5.08,0) 4(7.62,0) 5(10.16,0)
  silkscreen extent -2.16,-1.25 11.43,1.25, body extent -1.27,-1.27 11.56,1.27, height 8.38
"HEADER 8x1 0.1\"" [mm]
  rect 1.57x1.57 hole 1.02 paste-2539.97 mask+0: 1(0,0)
  round 1.57 hole 1.02 paste-2539.97 mask+0: 2(2.54,0) 3(5.08,0) 4(7.62,0) 5(10.16,0) 6(12.7,0) 7(15.24,0) 8(17.78,0)
  silkscreen extent -2.16,-1.25 19.05,1.25, body extent -1.4,-1.24 19.05,1.3, height 8.38
IND_SRR6038-180Y [mm]
  rect 0.5x0.5 smd paste-1 mask+0: 1(-3.175,0) 2(3.175,0)
  Top Layer region: 3.271,3.649 3.292,3.648 3.313,3.645 3.333,3.641 3.354,3.636 3.374,3.63 3.393,3.623 3.413,3.615 3.432,3.606 3.45,3.596 3.468,3.585 3.485,3.574 3.502,3.561 3.518,3.547 3.533,3.533 3.547,3.518 3.561,3.502 3.574,3.485 3.585,3.468 3.596,3.45 3.606,3.432 3.615,3.413 3.623,3.393 3.63,3.374 3.636,3.354 3.641,3.333 3.645,3.313 3.648,3.292 3.649,3.271 3.65,3.25 3.65,-3.25 3.649,-3.271 3.648,-3.292 3.645,-3.313 3.641,-3.333 3.636,-3.354 3.63,-3.374 3.623,-3.393 3.615,-3.413 3.606,-3.432 3.596,-3.45 3.585,-3.468 3.574,-3.485 3.561,-3.502 3.547,-3.518 3.533,-3.533 3.518,-3.547 3.502,-3.561 3.485,-3.574 3.468,-3.585 3.45,-3.596 3.432,-3.606 3.413,-3.615 3.393,-3.623 3.374,-3.63 3.354,-3.636 3.333,-3.641 3.313,-3.645 3.292,-3.648 3.271,-3.649 3.25,-3.65 1.05,-3.65 1.05,-2.488 1.155,-2.441 1.249,-2.395 1.341,-2.345 1.431,-2.291 1.519,-2.234 1.605,-2.173 1.688,-2.109 1.769,-2.042 1.847,-1.972 1.922,-1.898 1.994,-1.822 2.064,-1.743 2.13,-1.662 2.193,-1.578 2.253,-1.491 2.309,-1.403 2.361,-1.312 2.411,-1.219 2.456,-1.125 2.498,-1.028 2.536,-0.93 2.57,-0.831 2.6,-0.731 2.627,-0.629 2.649,-0.526 2.667,-0.423 2.682,-0.319 2.692,-0.214 2.698,-0.11 2.7,0 2.698,0.11 2.692,0.214 2.682,0.319 2.667,0.423 2.649,0.526 2.627,0.629 2.6,0.731 2.57,0.831 2.536,0.93 2.498,1.028 2.456,1.125 2.411,1.219 2.361,1.312 2.309,1.403 2.253,1.491 2.193,1.578 2.13,1.662 2.064,1.743 1.994,1.822 1.922,1.898 1.847,1.972 1.769,2.042 1.688,2.109 1.605,2.173 1.519,2.234 1.431,2.291 1.341,2.345 1.249,2.395 1.155,2.441 1.05,2.488 1.05,3.65 3.25,3.65
  Top Layer region: -1.05,2.488 -1.155,2.441 -1.249,2.395 -1.341,2.345 -1.431,2.291 -1.519,2.234 -1.605,2.173 -1.688,2.109 -1.769,2.042 -1.847,1.972 -1.922,1.898 -1.994,1.822 -2.064,1.743 -2.13,1.662 -2.193,1.578 -2.253,1.491 -2.309,1.403 -2.361,1.312 -2.411,1.219 -2.456,1.125 -2.498,1.028 -2.536,0.93 -2.57,0.831 -2.6,0.731 -2.627,0.629 -2.649,0.526 -2.667,0.423 -2.682,0.319 -2.692,0.214 -2.698,0.11 -2.7,0 -2.698,-0.11 -2.692,-0.214 -2.682,-0.319 -2.667,-0.423 -2.649,-0.526 -2.627,-0.629 -2.6,-0.731 -2.57,-0.831 -2.536,-0.93 -2.498,-1.028 -2.456,-1.125 -2.411,-1.219 -2.361,-1.312 -2.309,-1.403 -2.253,-1.491 -2.193,-1.578 -2.13,-1.662 -2.064,-1.743 -1.994,-1.822 -1.922,-1.898 -1.847,-1.972 -1.769,-2.042 -1.688,-2.109 -1.605,-2.173 -1.519,-2.234 -1.431,-2.291 -1.341,-2.345 -1.249,-2.395 -1.155,-2.441 -1.05,-2.488 -1.05,-3.65 -3.25,-3.65 -3.271,-3.649 -3.292,-3.648 -3.313,-3.645 -3.333,-3.641 -3.354,-3.636 -3.374,-3.63 -3.393,-3.623 -3.413,-3.615 -3.432,-3.606 -3.45,-3.596 -3.468,-3.585 -3.485,-3.574 -3.502,-3.561 -3.518,-3.547 -3.533,-3.533 -3.547,-3.518 -3.561,-3.502 -3.574,-3.485 -3.585,-3.468 -3.596,-3.45 -3.606,-3.432 -3.615,-3.413 -3.623,-3.393 -3.63,-3.374 -3.636,-3.354 -3.641,-3.333 -3.645,-3.313 -3.648,-3.292 -3.649,-3.271 -3.65,-3.25 -3.65,3.25 -3.649,3.271 -3.648,3.292 -3.645,3.313 -3.641,3.333 -3.636,3.354 -3.63,3.374 -3.623,3.393 -3.615,3.413 -3.606,3.432 -3.596,3.45 -3.585,3.468 -3.574,3.485 -3.561,3.502 -3.547,3.518 -3.533,3.533 -3.518,3.547 -3.502,3.561 -3.485,3.574 -3.468,3.585 -3.45,3.596 -3.432,3.606 -3.413,3.615 -3.393,3.623 -3.374,3.63 -3.354,3.636 -3.333,3.641 -3.313,3.645 -3.292,3.648 -3.271,3.649 -3.25,3.65 -1.05,3.65
  silkscreen extent -0.73,-3.4 0.73,3.4, body extent -3.4,-3.4 3.4,3.4, height 4
IO-XLR5-F-BH-Footprint-1 [mm]
  oval 2.8x3.5 hole 1.6 mask+0: 3(0,-17.15)
  oval 2.8x3.4 hole 1.6 mask+0: 3PIN_1(-3.81,-12.7) 3PIN_2(3.81,-12.7) 5PIN_1(-3.81,-17.15) 5PIN_2(0,-13.34) 5PIN_4(6.98,-13.34) 5PIN_5(3.81,-17.15) G(-8.25,-6.98)
  round 0 hole 1.8 unplated mask+0: NPTH1(3.81,-8.89) NPTH2(-3.81,-3.81)
  silkscreen extent -12.15,-18.42 12.5,-1.1, body extent -12.85,-18.51 12.9,7.29, height 30.2
IO-XLR5-M-BH-Footprint-1 [mm]
  oval 2.8x3.4 hole 1.6 mask+0: 3(0,-17.78) 3PIN_1(3.81,-17.78) 3PIN_2(-3.81,-17.78) 5PIN_1(6.98,-17.78) 5PIN_2(3.81,-12.7) 5PIN_4(-3.81,-12.7) 5PIN_5(-6.98,-17.78) G(0,-12.7)
  round 0 hole 1.8 unplated mask+0: NPTH1(3.81,-8.89) NPTH2(-3.81,-3.81)
  silkscreen extent -12.5,-19.05 12.5,-1.14, body extent -12.7,-18.78 12.7,2.72, height 25.2
"Jumper 3 Solder Bridge 1-2 0603" [mil]
  round 1 smd mask+1.57: 1(-23.62,0) 2(22.64,-27.56)
  round 1 smd paste-99999 mask+1.57: 3(-23.62,-55.12)
  silkscreen extent -60,-87 60,32
M24C02-RMN6TP-SO8N-IPC_B [mm]
  rect 2.174x0.552 smd paste+0 mask+0: 1(-2.366,1.905)
  rrect100% 2.174x0.552 smd paste+0 mask+0: 2(-2.366,0.635) 3(-2.366,-0.635) 4(-2.366,-1.905) 5(2.366,-1.905) 6(2.366,-0.635) 7(2.366,0.635) 8(2.366,1.905)
  silkscreen extent -4.08,-2.45 0.78,2.45, body extent -3.7,-2.7 3.7,2.7, height 0.25
"Mounting Hole M3 No Washer" [mil] "Mounting Hole"
  round 256 hole 134: 1(0,0)
"Mounting Hole M3 No Washer NPTH" [mil] "Mounting Hole"
  round 0 hole 134 unplated: 1(0,0)
  Top Layer keep-out circle w60: c0,0 r98
  Bottom Layer keep-out circle w60: c0,0 r98
  Keep-Out Layer circle w19: c0,0 r77.5
MURA-OKI-78SR-3 [mm] "THMT, 3-Leads, Body 10.4x7.6mm"
  rect 1.8x2.3 hole 1.1: 1(2.5,0)
  oval 1.8x2.3 hole 1.1: 2(0,0) 3(-2.6,0)
  silkscreen extent -5.2,-4.85 6.09,2.75, body extent -5.21,-4.9 5.21,2.83, height 16.59
NXP-TSSOP-8_M [mm] "TSSOP, 8-Leads, Body 3.1x3.1mm, Pitch 0.65mm, IPC Low Density"
  oval 2x0.45 smd: 1(-2.2,0.975) 2(-2.2,0.325) 3(-2.2,-0.325) 4(-2.2,-0.975) 5(2.2,-0.975) 6(2.2,-0.325) 7(2.2,0.325) 8(2.2,0.975)
  silkscreen extent -2.33,-1.55 0.8,1.87, body extent -1.55,-1.55 1.55,1.55, height 1.1
ONSEMI_SOT65P210X110-3N [mm] "SOT23, SC-70, SOT-323 3-Leads, Body 2.00x2.10mm, Pitch 0.65mm, IPC Medium Density"
  rect 0.95x0.5 smd: D(1.125,0) G(-1.125,0.65) S(-1.125,-0.65)
  silkscreen extent -1.25,-1.1 0.7,1.53, body extent -1.2,-1.07 1.2,1.07, height 1.1
PW0020A_L [mm] "SOP, 20-Leads, Body 6.6x4.5mm, Pitch 0.65mm, IPC High Density"
  rrect25% 1.2x0.4 smd mask+0.074: 1(-2.85,2.925) 2(-2.85,2.275) 3(-2.85,1.625) 4(-2.85,0.975) 5(-2.85,0.325) 6(-2.85,-0.325) 7(-2.85,-0.975) 8(-2.85,-1.625) 9(-2.85,-2.275) 10(-2.85,-2.925) 11(2.85,-2.925) 12(2.85,-2.275) 13(2.85,-1.625) 14(2.85,-0.975) 15(2.85,-0.325) 16(2.85,0.325) 17(2.85,0.975) 18(2.85,1.625) 19(2.85,2.275) 20(2.85,2.925)
  silkscreen extent -2.98,-3.3 1.85,3.8, body extent -3.21,-3.25 3.21,3.25, height 1
PW0024A_M [mm] "SOP, 24-Leads, Body 7.9x4.5mm, Pitch 0.65mm, IPC Low Density"
  rrect22% 1.6x0.45 smd: 1(-3.05,3.575) 2(-3.05,2.925) 3(-3.05,2.275) 4(-3.05,1.625) 5(-3.05,0.975) 6(-3.05,0.325) 7(-3.05,-0.325) 8(-3.05,-0.975) 9(-3.05,-1.625) 10(-3.05,-2.275) 11(-3.05,-2.925) 12(-3.05,-3.575) 13(3.05,-3.575) 14(3.05,-2.925) 15(3.05,-2.275) 16(3.05,-1.625) 17(3.05,-0.975) 18(3.05,-0.325) 19(3.05,0.325) 20(3.05,0.975) 21(3.05,1.625) 22(3.05,2.275) 23(3.05,2.925) 24(3.05,3.575)
  silkscreen extent -3.18,-3.95 1.85,4.47, body extent -3.21,-3.9 3.21,3.9, height 1
RESC1608X06N_0603_MED [mm] "Chip Resistor, 2-Leads, Body 1.60x0.80mm, IPC Medium Density"
  rect 0.85x0.9 smd: 1(-0.775,0) 2(0.775,0)
  body extent -0.85,-0.45 0.85,0.45, height 0.55
RESC3116X06N_1206MED [mm] "Chip Resistor, 2-Leads, Body 3.10x1.60mm, IPC Medium Density"
  rect 1.1x1.7 smd: 1(-1.4,0) 2(1.4,0)
  silkscreen extent -0.45,-0.75 0.45,0.75, body extent -1.6,-0.85 1.6,0.85, height 0.65
RESC7451X90M_2920 [mm] "Chip Resistor, 2-Leads, Body 7.36x5.12mm, IPC Low Density"
  rrect25% 2.35x5.55 smd: 1(-3.375,0) 2(3.375,0)
  silkscreen extent -1.94,-2.78 1.94,2.78, body extent -3.68,-2.56 3.68,2.56, height 0.9
S2751-46R [mm]
  rect 2.2x1.4 smd paste+0 mask+0: 1(0,0)
  silkscreen extent -1.05,-1.07 1.05,1.07, body extent -1.2,-0.8 1.2,0.8, height 0.25
SMDJ_DO-214AB [mm]
  rect 2.4x3.3 smd paste+0 mask+0: 1(-3.3,0) 2(3.3,0)
  Top Layer keep-out region: 3.81,-1.905 3.81,-2.921 -3.81,-2.921 -3.81,-1.905
  Top Layer keep-out region: -3.81,1.905 -3.81,2.921 3.81,2.921 3.81,1.905
  Top Layer keep-out region: -1.778,-1.651 -1.778,1.651 1.778,1.651 1.778,-1.651
  Keep-Out Layer region: -1.981,-1.651 -1.981,1.651 1.981,1.651 1.981,-1.651
  silkscreen extent -6.22,-3.24 4.19,3.24, body extent -4.06,-3.11 4.06,3.11, height 2.67
SOIC127P600X175-8N [mm] "SOIC, 8-Leads, Body 4.91x3.90mm, Pitch 1.27mm, IPC Medium Density"
  oval 1.45x0.6 smd: 1(-2.725,1.905) 2(-2.725,0.635) 3(-2.725,-0.635) 4(-2.725,-1.905) 5(2.725,-1.905) 6(2.725,-0.635) 7(2.725,0.635) 8(2.725,1.905)
  silkscreen extent -2.85,-2.5 1.6,2.88, body extent -3,-2.5 3,2.5, height 1.75
SOT95P280X145-5N [mm] "SOT23, 5-Leads, Body 2.90x2.80mm, Pitch 0.95mm, IPC Medium Density"
  rrect50% 1.1x0.6 smd: 1(-1.3,0.95) 2(-1.3,0) 3(-1.3,-0.95) 4(1.3,-0.95) 5(1.3,0.95)
  silkscreen extent -1.79,-1.59 0.94,1.76, body extent -1.5,-1.45 1.5,1.45, height 1.45
SOT125P700X220-5N [mm] "SOT23, 5-Leads, Body 3.75x7.00mm, Pitch 1.25mm, IPC Medium Density"
  rect 1.65x0.65 smd: 1(-3.225,1.25) 3(-3.225,-1.25) 4(3.225,-1.25) 5(3.225,0) 6(3.225,1.25)
  silkscreen extent -3.93,-2 2,2.41, body extent -3.7,-1.97 3.7,1.97, height 2.2
Type-C-31-M-12 [mm]
  oval 1.1x2.2 hole 0.6 slot 1.7 at 90 deg paste-2539.97 mask+0.1: 1(8.65,0) 4(0,0)
  oval 1.1x1.9 hole 0.6 slot 1.4 at 90 deg mask+0.1: 2(8.65,-4.18)
  oval 1.1x1.9 hole 0.6 slot 1.4 at 90 deg paste-2539.97 mask+0.1: 3(0,-4.18)
  round 0.025 smd mask+0.04: A1B12(1.125,0.768) A4B9(1.925,0.768) B1A12(7.525,0.769) B4A9(6.725,0.769)
  rect 0.3x1.3 smd paste-100 mask+0.04: A5(3.075,0.768) A6(4.075,0.768) A7(4.575,0.768) A8(5.575,0.768) B5(6.075,0.768) B6(5.075,0.768) B7(3.575,0.768) B8(2.575,0.768)
  round 0 hole 0.65 unplated paste-2539.97: NPTH1(1.425,-0.5) NPTH2(7.225,-0.5)
  silkscreen extent -0.14,-3.08 8.8,-1.22, body extent -0.14,-6.8 8.8,0.91, height 3.31
W6300-EVB-PICO2_0.4375_standoff [mm]
  rrect50% 1.7x1.7 / inner round 1.7 / far side rrect50% 1.7x1.7 hole 1.02: 1(0,0)
  round 1.7 hole 1.02: 2(0,-2.54) 3(0,-5.08) 4(0,-7.62) 5(0,-10.16) 6(0,-12.7) 7(0,-15.24) 8(0,-17.78) 9(0,-20.32) 10(0,-22.86) 11(0,-25.4) 12(0,-27.94) 13(0,-30.48) 14(0,-33.02) 15(0,-35.56) 16(0,-38.1) 17(0,-40.64) 18(0,-43.18) 19(0,-45.72) 20(0,-48.26) 21(17.78,-48.26) 22(17.78,-45.72) 23(17.78,-43.18) 24(17.78,-40.64) 25(17.78,-38.1) 26(17.78,-35.56) 27(17.78,-33.02) 28(17.78,-30.48) 29(17.78,-27.94) 30(17.78,-25.4) 31(17.78,-22.86) 32(17.78,-20.32) 33(17.78,-17.78) 34(17.78,-15.24) 35(17.78,-12.7) 36(17.78,-10.16) 37(17.78,-7.62) 38(17.78,-5.08) 39(17.78,-2.54) 40(17.78,0)
  silkscreen extent -3.3,-75.56 19.39,2.76, body extent -1.61,-80.38 19.39,4.97, height 26.1
"Z Logo 0.5\"" [mm]
  silkscreen extent -6,-3 6,3

## Part data
_1: library part CMP-00028-00046-1, "Z logo silkscreen"
C1: library part CMP-001-00160-2, "Ceramic Capacitor, Multilayer, Ceramic, 50V, 10% +Tol, 10% -Tol, X7R, 15% TC, 0.001uF, Surface Mount, 0603", Capacitor Type=Ceramic, Case/Package=0603, JLCPN=C2167129, Max Operating Temperature=125°C, Min Operating Temperature=-55°C, Tolerance=10%, Voltage Rating=50V, Mounting Technology="Surface Mount", Pins=2, RoHS Compliant=Yes
C2: library part CMP-001-00169-2, "Ceramic Capacitor, Multilayer, Ceramic, 10uF, 50V, 10%, X6S, 0805", Capacitor Type=Ceramic, Case/Package=0805, JLCPN=C440198, Max Operating Temperature=85°C, Min Operating Temperature=-55°C, Tolerance=10%, Voltage Rating=50V, Mounting Technology="Surface Mount", Pins=2, RoHS Compliant=Yes
C3 C6 C7 C11 C18 C24 C26 C28: library part CMP-001-00166-2, "CAP ALUM 470UF 20% 50V RADIAL TH", Capacitor Type=Aluminium, Case/Package=Radial, Max Operating Temperature=-40°C, Min Operating Temperature=125°C, Tolerance=20%, Voltage Rating=50V, Mounting Technology="Through Hole", Pins=2, RoHS Compliant=Yes
C4 C39: library part CMP-001-00121-2, "Ceramic Capacitor, Multilayer, Ceramic, 16V, 10% +Tol, 10% -Tol, X7R, 15% TC, 1uF, Surface Mount, 0603", Capacitor Type=Ceramic, Case/Package=0603, JLCPN=C59782, Max Operating Temperature=125°C, Min Operating Temperature=-55°C, Tolerance=10%, Voltage Rating=16V, Mounting Technology="Surface Mount", Pins=2, RoHS Compliant=Yes
C5 C8 C9 C10 C13 C14 C16 C23 C29 C30 C32 C33 C34 C36 C42 C43 C44: library part CMP-001-00102-4, "Ceramic Capacitor, Multilayer, Ceramic, 100V, 10% +Tol, 10% -Tol, X7R, 15% TC, 0.1uF, Surface Mount, 0603", Capacitor Type=Ceramic, Case/Package=0603, JLCPN=C113803, Max Operating Temperature=125°C, Min Operating Temperature=-55°C, Voltage Rating=100V, Mounting Technology="Surface Mount", Pins=2, RoHS Compliant=Yes
C12: library part CMP-001-00100-5, "Tantalum Capacitor, Polarized, Tantalum (dry/solid), 10V, 10% +Tol, 10% -Tol, 22uF, Surface Mount, 1210", Capacitor Type=Tantalum, Case/Package=1411, JLCPN=C55530, Max Operating Temperature=125°C, Min Operating Temperature=-55°C, Tolerance=10%, Voltage Rating=10V, Mounting Technology="Surface Mount", Pins=2, RoHS Compliant=Yes
C15 C22: library part CMP-001-00170-2, "Ceramic Capacitor, Multilayer, Ceramic, 2.2uF, 50V, 10%, X6S, 0805", Capacitor Type=Ceramic, Case/Package=0805, JLCPN=C125847, Max Operating Temperature=125°C, Min Operating Temperature=-55°C, Tolerance=10%, Voltage Rating=50V, Mounting Technology="Surface Mount", Pins=2, RoHS Compliant=Yes
C17: library part CMP-001-00179-1, "Polymer Aluminum Electrolytic Capacitor, 47 µF, -55 to 105 ¡C", Case/Package=2917, Max Operating Temperature=105°C, Min Operating Temperature=-55°C, Ripple Current=1.6A, Tolerance=20%, Voltage Rating=16V, Mounting Technology="Surface Mount"
C31 C40 C41: library part CMP-001-00084-4, "Ceramic Capacitor, Multilayer, Ceramic, 10uF, 16V, 10%, X6S, 0805", Capacitor Type=Ceramic, Case/Package=0805, JLCPN=C162413, Max Operating Temperature=105°C, Min Operating Temperature=-55°C, Tolerance=10%, Voltage Rating=16V, Mounting Technology="Surface Mount", Pins=2, RoHS Compliant=Yes
C38 C45: library part CMP-001-00095-1, "Ceramic Capacitor, Multilayer, Ceramic, 22uF, 16V, 20%, X6S, 0805", Capacitor Type=Ceramic, Case/Package=0805, Max Operating Temperature=105°C, Min Operating Temperature=-55°C, Tolerance=20%, Voltage Rating=16V, Mounting Technology="Surface Mount", Pins=2, RoHS Compliant=Yes
D1: library part CMP-004-00055-2, "SMDJ Series 6.5 W 7 V Uni-Directional Surface Mount TVS Diode - SMC", Max Operating Temperature=150°C, Max Surge Current=326.1A, Min Operating Temperature=-65°C, Mounting Technology="Surface Mount", Pins=2
D2: library part CMP-004-00034-2, "Rectifier Diode, Schottky, 1 Phase, 1 Element, 3A, 40V V(RRM), Silicon", Forward Voltage=500mV, Max Operating Temperature=125°C, Min Operating Temperature=-55°C, Pins=2, RoHS Compliant=Yes
D3 D4: library part CMP-004-00054-1, "Rectifier Diode, Schottky, 1 Phase, 1 Element, 3A, 60V V(RRM), Silicon, DO-214AC", Case/Package=SMA, Forward Current=3A, Forward Voltage=700mV, Max Operating Temperature=150°C, Min Operating Temperature=-55°C, Mounting Technology="Surface Mount", Pins=2
F1 F9: library part CMP-005-00022-1, "PTC Resettable Fuse 1.1A(hold) 1.95A(trip) 33VDC 20A 0.8W 0.5s 0.06Ohm SMD Solder Pad 1812 T/R", Case/Package=1812, Hold Current Rating=1.1A, Max Operating Temperature=85°C, Min Operating Temperature=-40°C, Trip Current Rating=1.9A, Mounting Technology="Surface Mount"
F2: library part CMP-005-00026-1, "SMD Resettable Fuse, PPTC, 2920 [7351 Metric], 0ZCF, 16 VDC, 2 A, 4 A, 4.5 s", Max Operating Temperature=85°C, Min Operating Temperature=-40°C, Mounting Technology="Surface Mount"
F10 F11 F12 F13 F14 F15 F16 F17: library part CMP-005-00023-1, "Polymeric PTC Resettable Fuse 24V 3 A Ih Surface Mount 2920 (7351 Metric), Conca", Current Rating=3A, Max Operating Temperature=85°C, Min Operating Temperature=-40°C, Mounting Technology="Surface Mount"
F18: library part CMP-005-00020-2, "PTC Resettable Fuse 0.5A(hold) 1A(trip) 15VDC 100A 0.6W 0.1s 0.15Ohm SMD Solder Pad 1206 T/R", Case/Package=1206, Current Rating=100A, JLCPN=C151162, Max Operating Temperature=85°C, Min Operating Temperature=-40°C, Mounting Technology="Surface Mount"
J1 J3 J13 J16 J20 J21 J24 J25: library part CMP-002-00251-3, "Terminal Block, Header, R/A, 3Way, Th;", Max Current Rating=6A, Voltage Rating=160V, Connector Type=Plug, Mounting Technology="Through Hole", Pins=3
J2: library part CMP-002-00236-8, "20V USB C 2.0 16P Female header", JLCPN=C165948
J4: library part CMP-002-00240-1, "Conn Header Vert 8POS 2.54MM", Connector Type=Header, Gender=Male, Mounting Technology="THROUGH HOLE", Pins=8
J5: library part CMP-002-00191-7, "B Series, 5 Pin XLR, Male, Horizontal Pcb Mount With Separate Ground Pin", Connector Type=XLR, Gender=Male, Pins=5
J6 J8: library part CMP-002-00239-1, "Conn Header Vert 5POS 2.54MM", Connector Type=Header, Gender=Male, Mounting Technology="Through Hole", Pins=5
J7: library part CMP-002-00250-1, "Conn Header Vert 6POS 2.54MM", Connector Type=Header, Gender=Male, Mounting Technology="Through Hole", Pins=6
J9 J14: library part CMP-002-00082-2, "Conn Header Vert 2POS 2.54MM", Max Operating Temperature=105°C, Min Operating Temperature=-40°C, Connector Type="BOARD CONNECTOR", Mounting Technology="Through Hole", Pins=2, RoHS Compliant=Yes
J15: library part CMP-002-00192-4, "B-Series 5-Pin XLR Female Horizontal PCB Mount with Separate Ground-Pin Metal Face Plate", Connector Type=XLR, Gender=Female, Pins=5
J26: library part CMP-002-00208-6, "Micro-Fit+, Vertical Header, 8 pin", Max Current Rating=12.5A, Connector Type=Micro-Fit+, Mounting Technology="Through Hole", Pins=8
JP1 JP2 JP3 JP4 JP5: library part CMP-009-00341-2, "0603 Solder Bridge Jumper Surface Mount", Case/Package=0603, Max Operating Temperature=155°C, Min Operating Temperature=-55°C, Tolerance=1%, Voltage Rating=75V, Mounting Technology="Surface Mount", Pins=2, RoHS Compliant=Yes
L1: library part CMP-006-00028-1, "General Purpose Inductor, 18uH, 30%, 1 Element, Ferrite-Core, SMD, 2727", Max Current Rating=1.7A, Max Operating Temperature=125°C, Min Operating Temperature=-40°C, Self Resonant Frequency=13.8MHz, Tolerance=30%, Pins=2, RoHS Compliant=Yes
L2 L3: library part CMP-006-00035-1, "Ferrite Beads Multi-Layer Power 600Ohm 25% 100MHz 2A 0.1Ohm DCR 0805 T/R", Case/Package=0805, Current Rating=2A, Max Operating Temperature=125°C, Min Operating Temperature=-55°C, Tolerance=25%, Mounting Technology="Surface Mount"
PS1: library part CMP-112-000000-3, "ISOLATED MODULE DC DC CONVERTERS", Package="SIP-7 Gaptec", Check_prices=https://www.snapeda.com/parts/1S7BE_0303S3U/Gaptec/view-part/?ref=eda, Design Item ID=1S7BE_0303S3U, MF=Gaptec, MP=1S7BE_0303S3U, SnapEDA_Link=https://www.snapeda.com/parts/1S7BE_0303S3U/Gaptec/view-part/?ref=snap, Source=1S7BE_0303S3U.SchLib
PTH1 PTH2 PTH4: library part CMP-00028-00043-4
PTH3: library part CMP-00028-00008-6
Q1: library part CMP-013-00041-2, "Small Signal Field-Effect Transistor, 0.31A I(D), 60V, 1-Element, N-Channel, Silicon, Metal-oxide Semiconductor FET", Case/Package="SC-70, SOT-323", Max Operating Temperature=150°C, Pins=3, RoHS Compliant=Yes, Simulation ModelName=DI_2N7002K, Simulation PortMap=(D:1),(G:2),(S:3)
R1 R9 R13: library part CMP-009-00202-2, "Fixed Resistor, Metal Glaze/thick Film, 0.1W, 220ohm, 75V, 1% +/-Tol, 100ppm/Cel, Surface Mount, 0603", Case/Package=0603, JLCPN=C22962, Max Operating Temperature=155°C, Min Operating Temperature=-55°C, Power=100mW, Tolerance=1%, Voltage Rating=50V, Mounting Technology="Surface Mount", Pins=2, RoHS Compliant=Yes
R2 R31 R35 R38: library part CMP-009-00328-3, "Fixed Resistor, Metal Glaze/thick Film, 0.1W, 100000ohm, 75V, 0.5% +/-Tol, 100ppm/Cel, Surface Mount, 0603", Case/Package=0603, JLCPN=C25803, Max Operating Temperature=155°C, Min Operating Temperature=-55°C, Power=100mW, Tolerance=0.5%, Voltage Rating=50V, Mounting Technology="Surface Mount", Pins=2, RoHS Compliant=Yes
R3: library part CMP-009-00342-2, "Fixed Resistor, Metal Glaze/thick Film, 0.1W, 1Mohm,", Case/Package=0603, JLCPN=C22935, Max Operating Temperature=155°C, Min Operating Temperature=-55°C, Power=100mW, Tolerance=1%, Voltage Rating=25V, Mounting Technology="Surface Mount", Pins=2, RoHS Compliant=Yes
R4 R5 R29 R30 R32 R33 R34: library part CMP-009-00204-6, "RC Series 0603 0.1 W 0 Ohm Jumper Surface Mount Thick Film Chip Resistor", Case/Package=0603, JLCPN=C21189, Max Operating Temperature=155°C, Min Operating Temperature=-55°C, Power=100mW, Tolerance=1%, Voltage Rating=75V, Mounting Technology="Surface Mount", Pins=2, RoHS Compliant=Yes
R6 R12 R15 R16 R17 R18 R19 R20 R21: library part CMP-009-00302-3, "Fixed Resistor, Metal Glaze/thick Film, 0.1W, 330ohm, 75V, 1% +/-Tol, 100ppm/Cel, Surface Mount, 0603", Case/Package=0603, JLCPN=C23138, Max Operating Temperature=155°C, Min Operating Temperature=-55°C, Power=100mW, Tolerance=1%, Voltage Rating=50V, Mounting Technology="Surface Mount", Pins=2, RoHS Compliant=Yes
R7 R8: library part CMP-009-00300-2, "Fixed Resistor, Metal Glaze/thick Film, 0.1W, 470ohm, 75V, 1% +/-Tol, 100ppm/Cel, Surface Mount, 0603", Case/Package=0603, JLCPN=C114669, Max Operating Temperature=155°C, Min Operating Temperature=-55°C, Power=100mW, Tolerance=1%, Voltage Rating=50V, Mounting Technology="Surface Mount", Pins=2, RoHS Compliant=Yes
R10 R11: library part CMP-009-00301-2, "Fixed Resistor, Metal Glaze/thick Film, 0.1W, 680ohm, 75V, 1% +/-Tol, 100ppm/Cel, Surface Mount, 0603", Case/Package=0603, JLCPN=C112310, Max Operating Temperature=155°C, Min Operating Temperature=-55°C, Power=100mW, Tolerance=1%, Voltage Rating=50V, Mounting Technology="Surface Mount", Pins=2, RoHS Compliant=Yes
R14 R27 R28: library part CMP-009-00304-2, "Fixed Resistor, Metal Glaze/thick Film, 0.1W, 2200ohm, 75V, 1% +/-Tol, 100ppm/Cel, Surface Mount, 0603", Case/Package=0603, JLCPN=C114662, Max Operating Temperature=155°C, Min Operating Temperature=-55°C, Power=100mW, Tolerance=1%, Voltage Rating=50V, Mounting Technology="Surface Mount", Pins=2, RoHS Compliant=Yes
R22 R23: library part CMP-009-00331-3, "Fixed Resistor, Metal Glaze/thick Film, 0.1W, 5100ohm, 75V, 1% +/-Tol, 100ppm/Cel, Surface Mount, 0603", Case/Package=0603, JLCPN=C23186, Max Operating Temperature=155°C, Min Operating Temperature=-55°C, Power=100mW, Tolerance=1%, Voltage Rating=75V, Mounting Technology="Surface Mount", Pins=2, RoHS Compliant=Yes
R24: library part CMP-009-00343-1, "Fixed Resistor, Metal Glaze/thick Film, 0.1W, 4700ohm, 75V, 1% +/-Tol, 100ppm/Cel, Surface Mount, 0603", Case/Package=0603, Max Operating Temperature=155°C, Min Operating Temperature=-55°C, Power=100mW, Tolerance=1%, Voltage Rating=75V, Mounting Technology="Surface Mount", Pins=2, RoHS Compliant=Yes
R25 R26 R39 R41: library part CMP-009-00306-2, "Fixed Resistor, Metal Glaze/thick Film, 0.1W, 10000ohm, 75V, 1% +/-Tol, 100ppm/Cel, Surface Mount, 0603", Case/Package=0603, JLCPN=C98220, Max Operating Temperature=155°C, Min Operating Temperature=-55°C, Power=100mW, Tolerance=1%, Voltage Rating=50V, Mounting Technology="Surface Mount", Pins=2, RoHS Compliant=Yes
R36: library part CMP-009-00344-1, "Fixed Resistor, Metal Glaze/thick Film, 0.25W, 20000ohm, 200V, 1% +/-Tol, 100ppm/Cel, Surface Mount, 1206", Case/Package=1206, Max Operating Temperature=155°C, Min Operating Temperature=-55°C, Power=250mW, Tolerance=1%, Voltage Rating=200V, Mounting Technology="Surface Mount", Pins=2, RoHS Compliant=Yes